# Altium PCB Motherboard.PcbDoc (part 1 of 2)
Units mm, origin at the board's own origin, x right, y up, seen from the top; angles counter-clockwise.
Board outline 89.6 x 89.6 mm, 4 copper layers (Top Layer, Int1 (GND), Int2 (PWR), Bottom Layer), stack 1.369 mm thick; 156 components, 137 nets, 650 pads, 0 vias.
Unrouted connection lines stored in the file: 429.
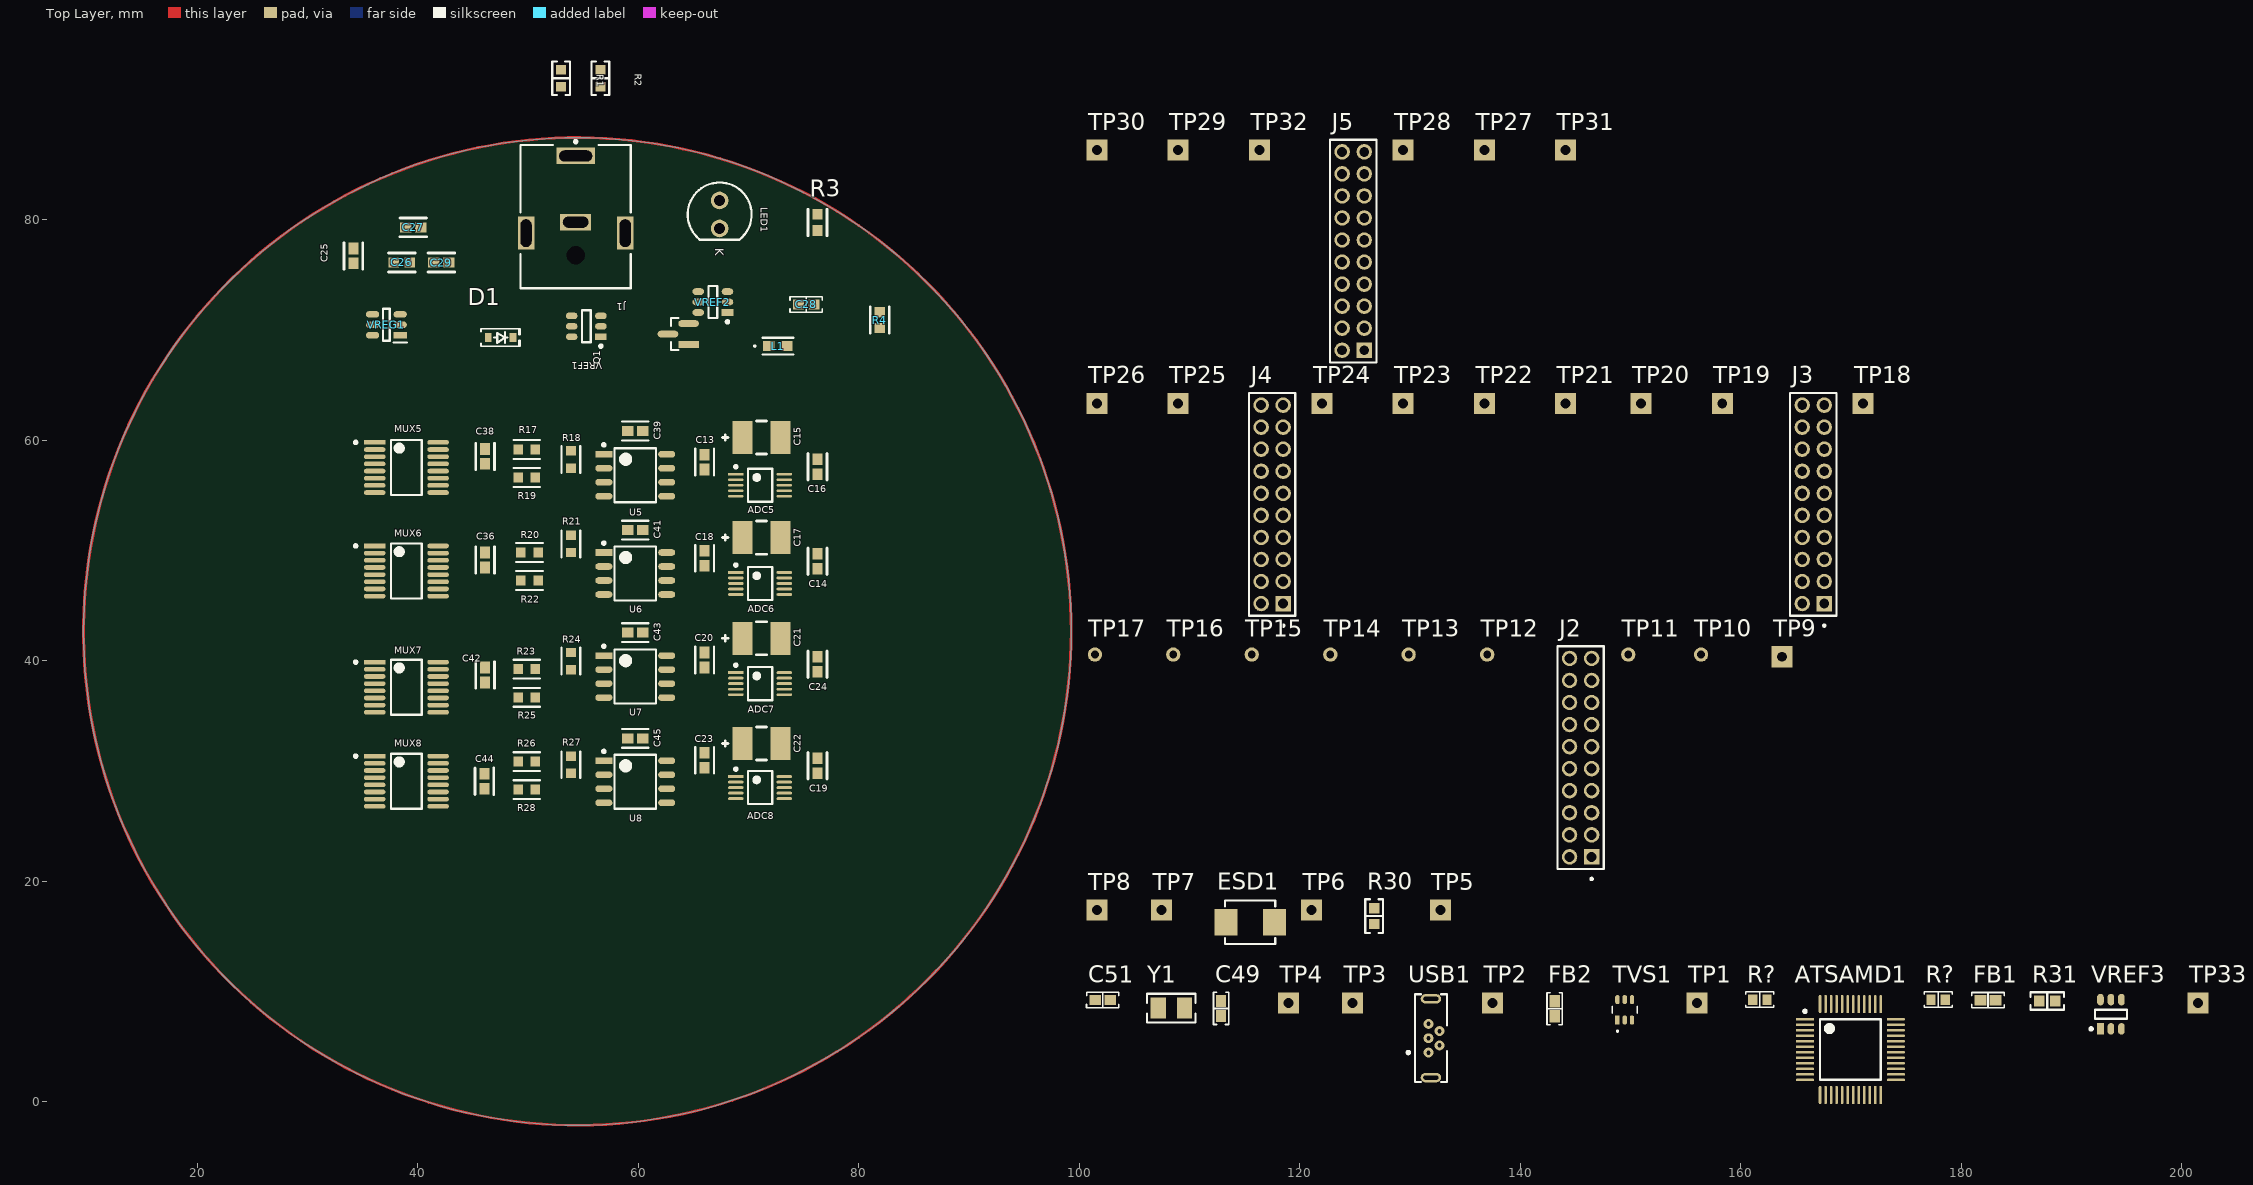
[diagram p0: Top Layer view]
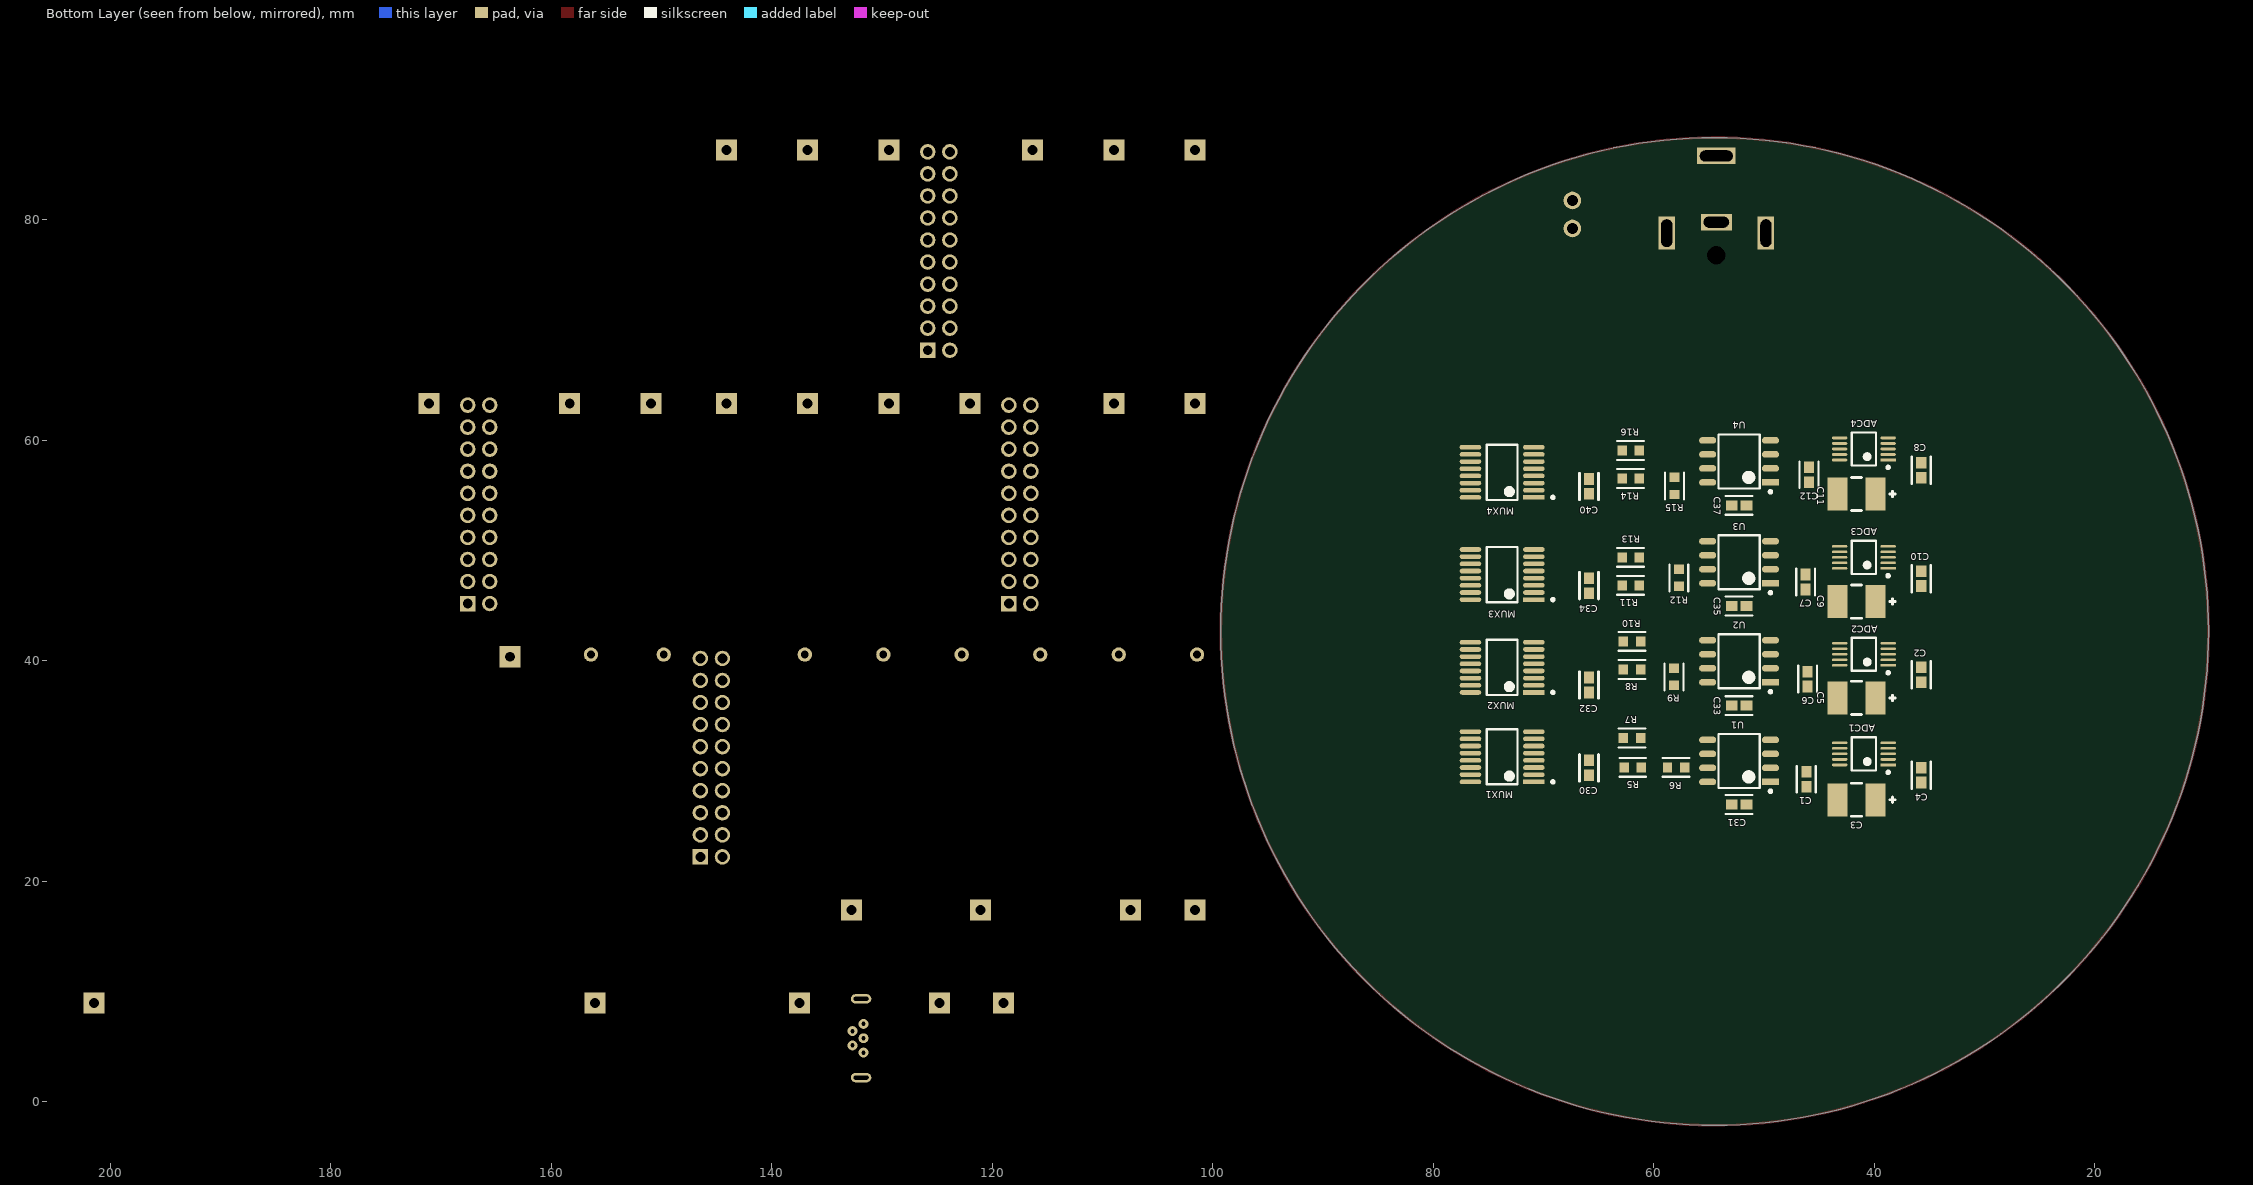
[diagram p1: Bottom Layer view, seen from below]
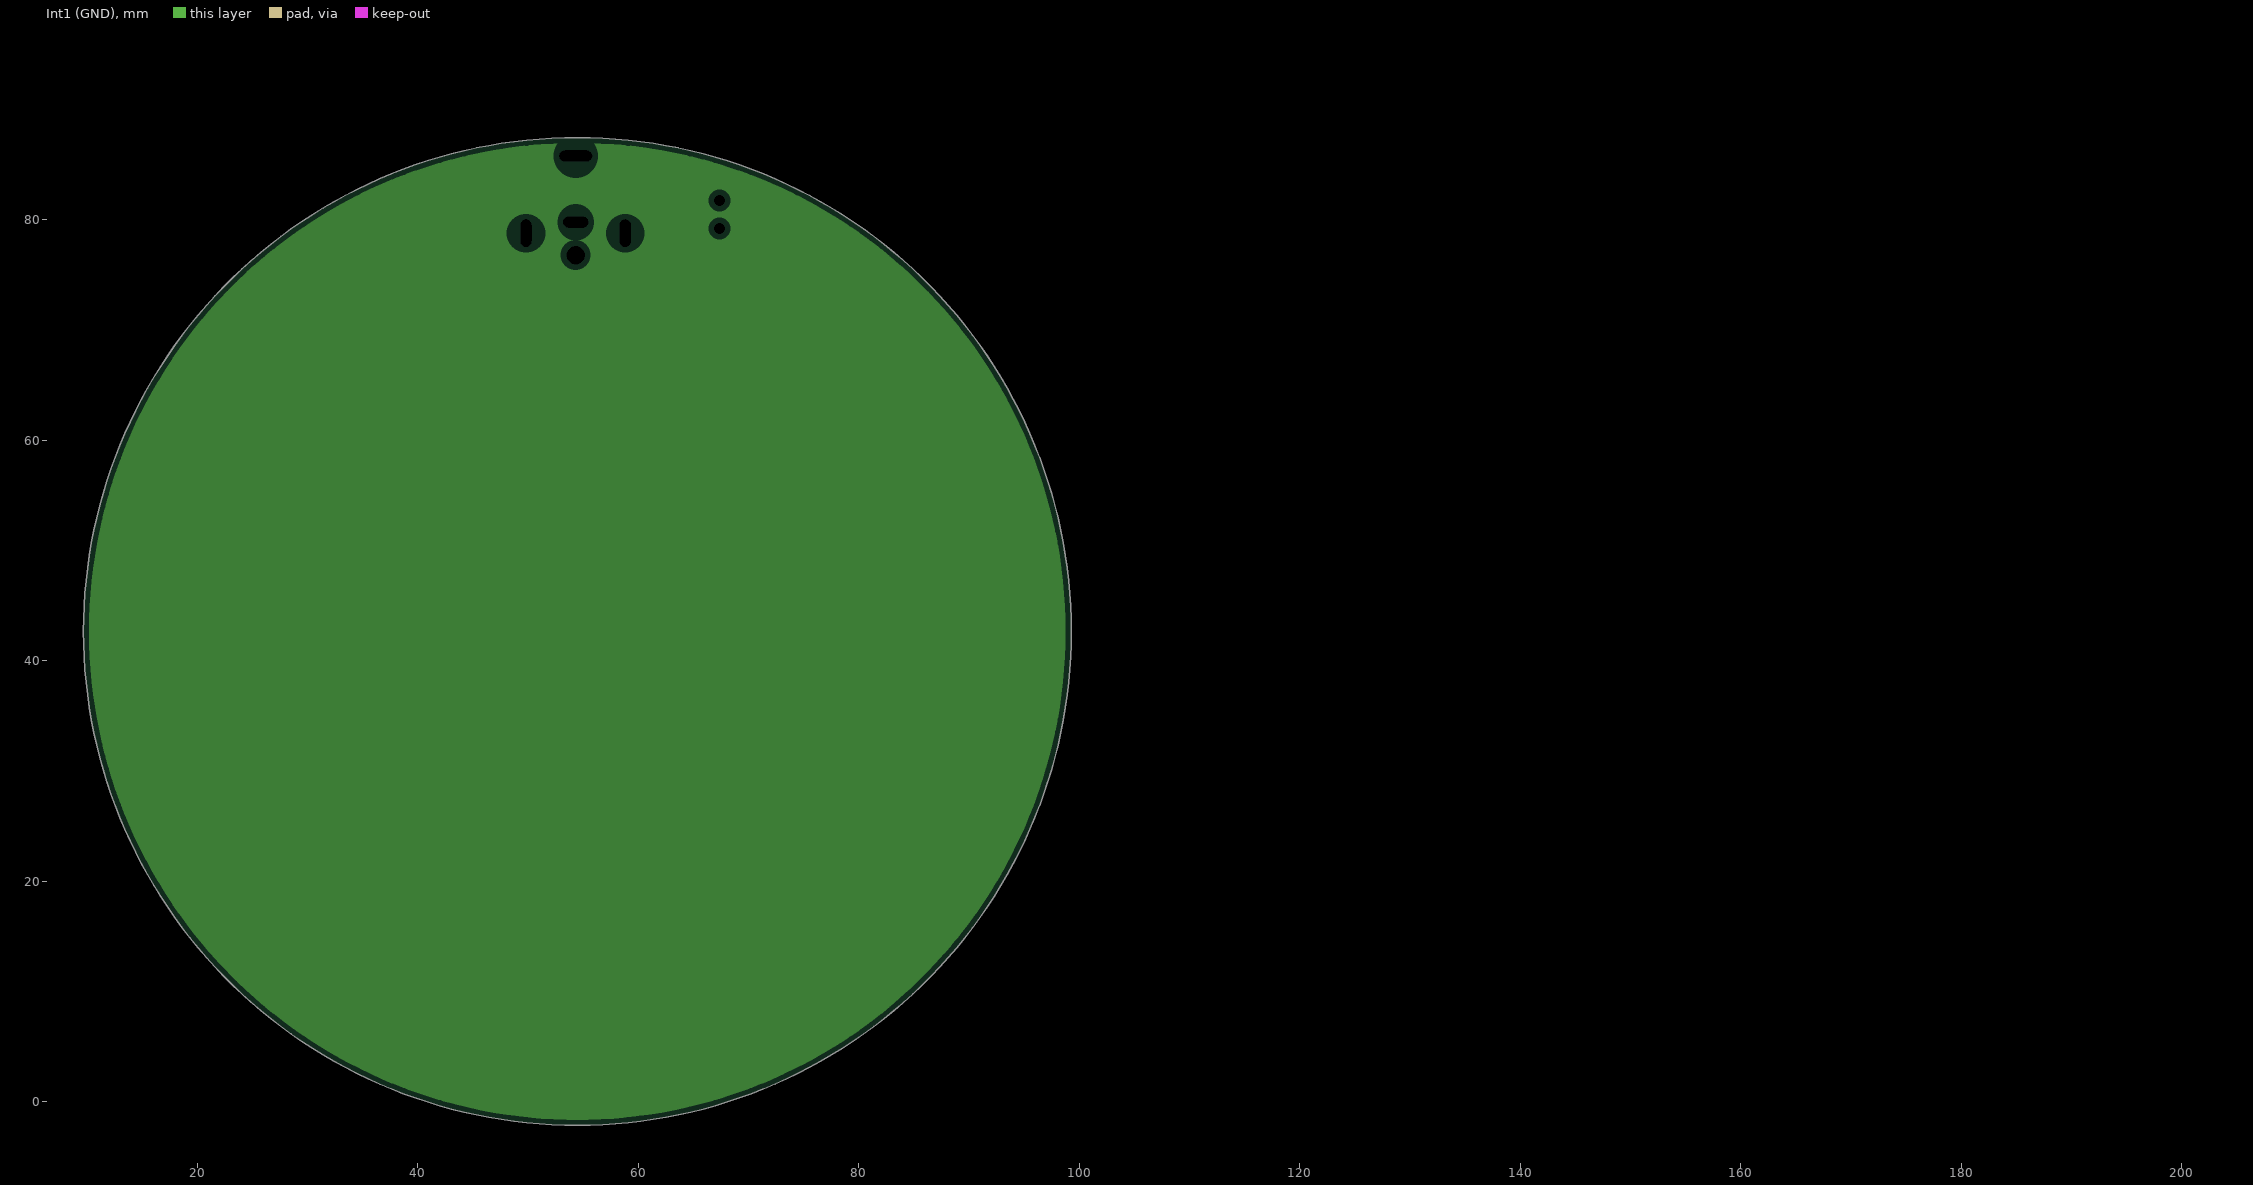
[diagram p2: Int1 (GND), clearances drawn from the general rule]
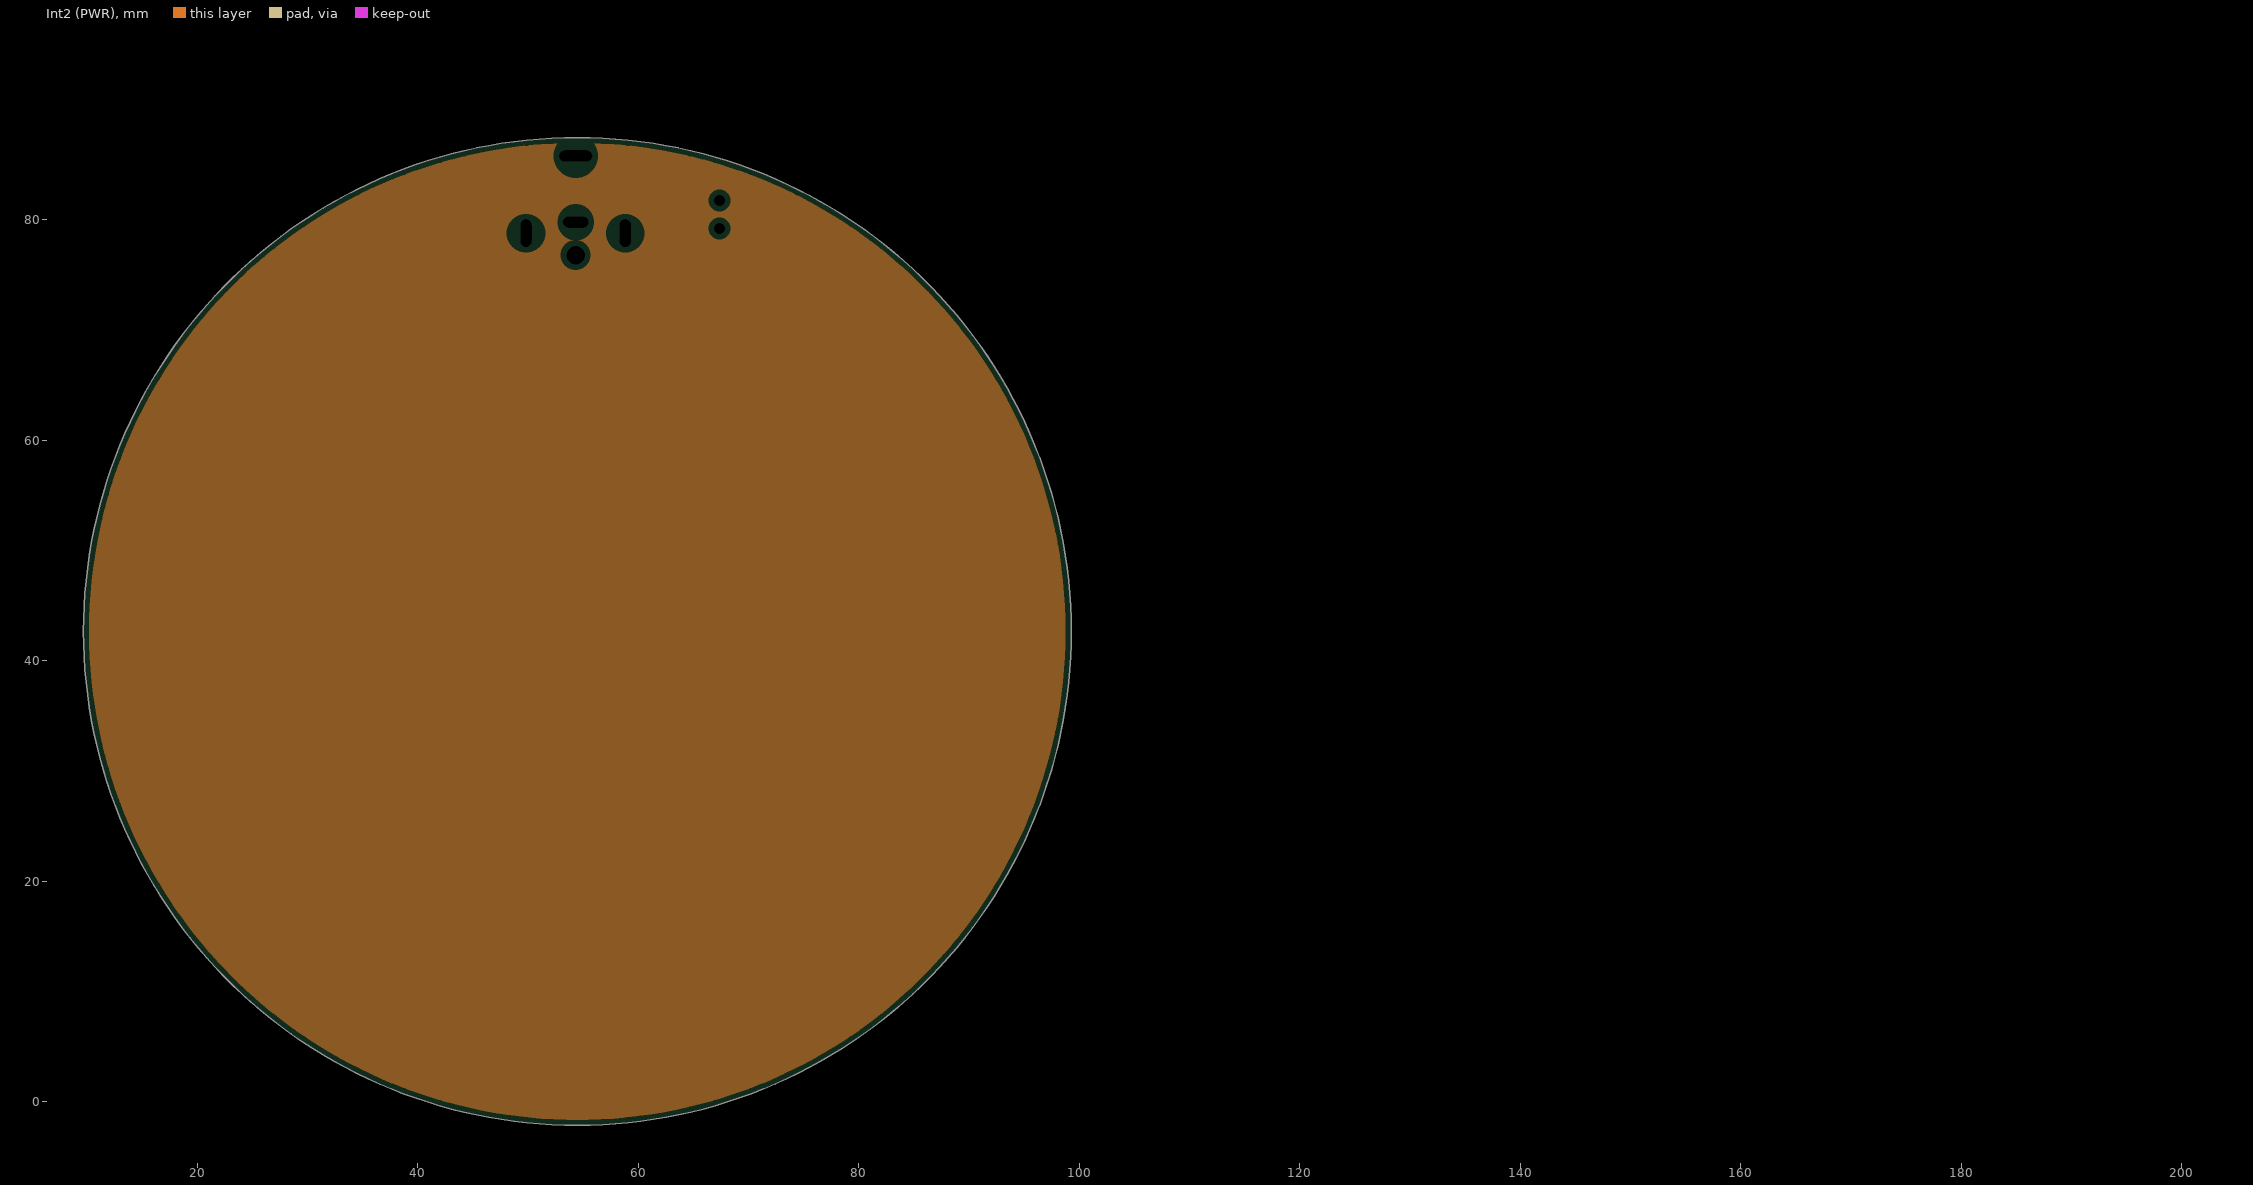
[diagram p3: Int2 (PWR), clearances drawn from the general rule]

## Layer stack, top to bottom
Top Solder: solder mask 0.0254, SM-001, Dk 4
Top Layer: signal copper 0.035
Dielectric 1: prepreg 0.1295, PP-017, Dk 4.3
Dielectric 2: prepreg 0.1295, PP-017, Dk 4.3
Int1 (GND): plane copper 0.035
Dielectric 3: core 0.7112, Core-039, Dk 4.8
Int2 (PWR): plane copper 0.035
Dielectric 4: prepreg 0.1295, PP-017, Dk 4.3
Dielectric 5: prepreg 0.1295, PP-017, Dk 4.3
Bottom Layer: signal copper 0.035
Bottom Solder: solder mask 0.0254, SM-001, Dk 4

## Board outline
9.683,42.672 ccw(c54.483,42.672) 54.483,-2.128 ccw(c54.483,42.672) 99.283,42.672 ccw(c54.483,42.672) 54.483,87.472 ccw(c54.483,42.672)

## Design rules (kind name [scope] priority, off if disabled: settings)
BoardOutlineClearance [All] p1: gap=0.2 ignorepadtopadclearanceinfootprint=FALSE
Clearance [All] p1: gap=0.2 ignorepadtopadclearanceinfootprint=TRUE
HoleSize [All] p1: absolutevalues=TRUE maxlimit=2.54 minlimit=0.2 maxpercent=80.000 minpercent=20.000
HoleToHoleClearance [All] p1: gap=0.5 allowstackedmicrovias=TRUE
MinimumAnnularRing [All] p1: minimumring=0.2
PlaneClearance [All] p1: clearance=0.508
PlaneConnect [All] p1: planeconnectstyle=Relief reliefexpansion=0.508 reliefentries=4 reliefconductorwidth=0.254 reliefairgap=0.254
PolygonConnect [All] p1: connectstyle=Relief reliefconductorwidth=0.254 reliefentries=4 polygonreliefangle="90 Angle" airgapwidth=0.254
RoutingVias [All] p1: holewidth=0.3 width=0.7 viastyle="Through Hole" minholewidth=0.2 minwidth=0.5 maxholewidth=0.5 maxwidth=0.9
SolderMaskExpansion [All] p1: expansion=0.102 istentingtop=FALSE
UnRoutedNet [All] p1: checkbadconnections=TRUE
Width [All] p1: maxlimit=0.5 minlimit=0.2 preferedwidth=0.3
25 further rules are at their usual default settings.

## Classes and differential pairs
component class Arduino: ATSAMD1 C46 C47 C49 C50 C51 C53 C54 C55 C57 D1 FB1 FB2 R29 R31 R? TP1 TP2 TP3 TP4 TP33 TVS1 USB1 VREF3 Y1
component class "Wheatstone bridge part I (Main)": *3 ADC1 ADC2 ADC3 C1 C2 C3 C4 C5 C6 C7 C8 C9 C10 C11 C12 C30 C32 C34 J2 MUX1 MUX2 MUX3 R5 R6 R7 R8 R9 R10 R11 R12 R13 TP9 TP10 TP11 TP12 TP13 TP14 TP15 TP16 TP17 U1 U2 U3
component class "Wheatstone bridge part II (Main)": *4 ADC4 ADC5 ADC6 C13 C14 C15 C16 C17 C18 C19 C20 C21 C36 C37 C38 C39 C40 C41 J3 J4 MUX4 MUX5 MUX6 R14 R15 R16 R17 R18 R19 R20 R21 R22 TP18 TP19 TP20 TP21 TP22 TP23 TP24 TP25 TP26 U4 U5 U6
component class "Wheatstone bridge part III (Main)": *5 ADC7 ADC8 C22 C23 C24 C31 C33 C35 C42 C43 C44 C45 J5 MUX7 MUX8 R23 R24 R25 R26 R27 R28 TP27 TP28 TP29 TP30 TP31 TP32 U7 U8
component class "Power Supply Unit (Main)": *2 C25 C26 C27 C28 C29 ESD1 J1 L1 LED1 Q1 R1 R2 R3 R4 R30 TP5 TP6 TP7 TP8 VREF1 VREF2 VREG1

## Components (designator, comment, footprint, x,y, rotation, side; value= is the part's Value field where it differs from the comment)
ADC1 "" MCP33141-10-E/MS 40.94,31.568 r0 bottom
ADC2 "" MCP33141-10-E/MS 40.94,40.598 r0 bottom
ADC3 "" MCP33141-10-E/MS 40.948,49.395 r0 bottom
ADC4 "" MCP33141-10-E/MS 40.948,59.229 r0 bottom
ADC5 "" MCP33141-10-E/MS 71.052,55.937 r0 top
ADC6 "" MCP33141-10-E/MS 71.052,47.023 r0 top
ADC7 "" MCP33141-10-E/MS 71.052,37.939 r0 top
ADC8 "" MCP33141-10-E/MS 71.052,28.511 r0 top
ATSAMD1 "" ATSAMD21G18-AU 169.958,4.75 r0 top
C1 "CC0603JRX7R9BB104" FP-CC0603-DA-IPC_B 46.169,29.261 r90 bottom
C2 "CC0603JRX7R9BB104" FP-CC0603-DA-IPC_B 35.741,38.735 r90 bottom
C3 "Cap 10 uF 16V Tantalum 1411" FP-293D-B-MFG 41.621,27.4 r180 bottom value=10μF
C4 "CC0603KPX7R7BB105" FP-CC0603-DA-IPC_B 35.741,29.642 r270 bottom value=1μF
C5 "CC0603JRX7R9BB104" FP-293D-B-MFG 41.621,36.644 r180 bottom
C6 "CC0603JRX7R9BB104" FP-CC0603-DA-IPC_B 46.042,38.349 r270 bottom
C7 "Cap 10 uF 16V Tantalum 1411" FP-CC0603-DA-IPC_B 46.222,47.157 r90 bottom value=10μF
C8 "CC0603KPX7R7BB105" FP-CC0603-DA-IPC_B 35.741,57.282 r90 bottom value=1μF
C9 "CC0603JRX7R9BB104" FP-293D-B-MFG 41.621,45.379 r180 bottom
C10 "CC0603JRX7R9BB104" FP-CC0603-DA-IPC_B 35.741,47.465 r270 bottom
C11 "Cap 10 uF 16V Tantalum 1411" FP-293D-B-MFG 41.621,55.147 r180 bottom value=10μF
C12 "CC0603KPX7R7BB105" FP-CC0603-DA-IPC_B 45.915,56.893 r270 bottom value=1μF
C13 "Cap Ceramic 0.1 uF SMT 0603" FP-CC0603-DA-IPC_B 66.032,58.033 r270 top
C14 "Cap 10 uF 16V Tantalum 1411" FP-CC0603-DA-IPC_B 76.259,49.036 r270 top value=10μF
C15 "Cap Ceramic 1 uF SMT 0603" FP-293D-B-MFG 71.179,60.265 r180 top value=1μF
C16 "Cap Ceramic 0.1 uF SMT 0603" FP-CC0603-DA-IPC_B 76.259,57.614 r90 top
C17 "Cap 10 uF 16V Tantalum 1411" FP-293D-B-MFG 71.179,51.185 r180 top value=10μF
C18 "Cap Ceramic 1 uF SMT 0603" FP-CC0603-DA-IPC_B 66.032,49.306 r90 top value=1μF
C19 "Cap Ceramic 0.1 uF SMT 0603" FP-CC0603-DA-IPC_B 76.259,30.486 r270 top
C20 "Cap 10 uF 16V Tantalum 1411" FP-CC0603-DA-IPC_B 66.032,40.079 r270 top value=10μF
C21 "Cap Ceramic 1 uF SMT 0603" FP-293D-B-MFG 71.179,42.051 r180 top value=1μF
C22 "Cap Ceramic 0.1 uF SMT 0603" FP-293D-B-MFG 71.179,32.502 r180 top
C23 "Cap Ceramic 0.1 uF SMT 0603" FP-CC0603-DA-IPC_B 66.032,30.986 r90 top
C24 "Cap 10 uF 16V Tantalum 1411" FP-CC0603-DA-IPC_B 76.259,39.698 r90 top value=10μF
C25 "Cap Ceramic 2.2 uF SMT 0603" FP-CC0603-DA-IPC_B 34.163,76.733 r90 top
C26 "Cap Ceramic 0.22 uF SMT 0603" FP-GRM188-0_1-e0_2_0_5-IPC_B 38.561,76.144 r180 top value=0.22µF
C27 "Cap Ceramic 0.1 uF SMT 0603" FP-CC0603-DA-IPC_B 39.6,79.325 r0 top
C28 "GRM188R60J106KE47J" "Cap Ceramic 10 uF SMT 0603" 75.235,72.339 r0 top
C29 "Cap Ceramic 2.2 uF SMT 0603" FP-CC0603-DA-IPC_B 42.145,76.137 r180 top
C30 "CC0603JRX7R9BB104" FP-CC0603-DA-IPC_B 65.881,30.301 r90 bottom
C31 "Cap Ceramic 1 uF SMT 0603" FP-CC0603-DA-IPC_B 52.265,26.977 r0 bottom value=1μF
C32 "CC0603JRX7R9BB104" FP-CC0603-DA-IPC_B 65.881,37.816 r90 bottom
C33 "Cap Ceramic 0.1 uF SMT 0603" FP-CC0603-DA-IPC_B 52.265,35.936 r0 bottom
C34 "CC0603JRX7R9BB104" FP-CC0603-DA-IPC_B 65.881,46.828 r90 bottom
C35 "Cap Ceramic 0.1 uF SMT 0603" FP-CC0603-DA-IPC_B 52.265,44.982 r0 bottom
C36 "Cap Ceramic 0.1 uF SMT 0603" FP-CC0603-DA-IPC_B 46.119,49.156 r270 top
C37 "Cap Ceramic 0.1 uF SMT 0603" FP-CC0603-DA-IPC_B 52.265,54.107 r0 bottom
C38 "Cap Ceramic 0.1 uF SMT 0603" FP-CC0603-DA-IPC_B 46.119,58.547 r270 top
C39 "Cap Ceramic 0.1 uF SMT 0603" FP-CC0603-DA-IPC_B 59.735,60.861 r0 top
C40 "Cap Ceramic 0.1 uF SMT 0603" FP-CC0603-DA-IPC_B 65.881,55.824 r90 bottom
C41 "Cap Ceramic 0.1 uF SMT 0603" FP-CC0603-DA-IPC_B 59.735,51.863 r0 top
C42 "Cap Ceramic 0.1 uF SMT 0603" FP-CC0603-DA-IPC_B 46.119,38.725 r270 top
C43 "Cap 10 uF 16V Tantalum 1411" FP-CC0603-DA-IPC_B 59.735,42.565 r0 top value=10μF
C44 "Cap Ceramic 0.1 uF SMT 0603" FP-CC0603-DA-IPC_B 46.05,29.077 r270 top
C45 "Cap Ceramic 1 uF SMT 0603" FP-CC0603-DA-IPC_B 59.735,32.972 r0 top value=1μF
C49 "CC0603JRNPO9BN200" "Capacitor 20 pF SMT 0603" 112.881,8.475 r90 top value="20 pF"
C51 "CC0603JRNPO9BN200" "Capacitor 20 pF SMT 0603" 102.13,9.25 r0 top value="20 pF"
D1 "" "Schottky Diode 30V SMT" 47.514,69.342 r0 top
ESD1 "TVS Diode 32.4V Clamp SMT" SMBJ20CA 115.506,16.301 r0 top
FB1 "BLM18PG471SN1D" "Ferrite Bead 470R SMT 0603" 182.434,9.225 r0 top value="470 Ω @ 100 MHz"
FB2 "BLM18PG471SN1D" "Ferrite Bead 470R SMT 0603" 143.132,8.45 r90 top value="470 Ω @ 100 MHz"
J1 "PJ-063AH" "DC Power Jack 2.1mm" 54.325,79.8 r270 top
J2 "BF050-20-A-B-0600-0300-L-G" "Headers 20 Pos TH 0.079\" A" 145.482,21.226 r90 top
J3 "BF050-20-A-B-0600-0300-L-G" "Headers 20 Pos TH 0.079\" A" 166.583,44.202 r90 top
J4 "BF050-20-A-B-0600-0300-L-G" "Headers 20 Pos TH 0.079\" A" 117.506,44.202 r90 top
J5 "BF050-20-A-B-0600-0300-L-G" "Headers 20 Pos TH 0.079\" A" 124.856,67.178 r90 top
L1 "" "Inductor 4.7 uH SMT 0603" 72.668,68.555 r0 top value=4.7μH
LED1 "151053GS03000" "Type 5mm" 67.386,80.493 r270 top
MUX1 "TMUX1208PWR" TMUX1208PWR 73.753,31.303 r0 bottom
MUX2 "TMUX1208PWR" TMUX1208PWR 73.753,39.414 r0 bottom
MUX3 "TMUX1208PWR" TMUX1208PWR 73.753,47.83 r0 bottom
MUX4 "TMUX1208PWR" TMUX1208PWR 73.753,57.104 r0 bottom
MUX5 "TMUX1208PWR" TMUX1208PWR 38.973,57.545 r0 top
MUX6 "TMUX1208PWR" TMUX1208PWR 38.973,48.154 r0 top
MUX7 "TMUX1208PWR" TMUX1208PWR 38.973,37.614 r0 top
MUX8 "TMUX1208PWR" TMUX1208PWR 38.973,29.087 r0 top
Q1 "MOSFET P-Channel 30V SMD" IRLML9303TRPBF 63.635,69.65 r180 top
R1 "AC0603FR-072K4L" "Res 2K4 SMT 0603" 53.008,92.848 r270 top value=2K4
R2 "AC0603FR-075K1L" "Res 5K1 SMT 0603" 56.574,92.848 r270 top value=5K1
R3 "Res 22K1 SMT 0603" CRCW060322K1FKEA-Footprint-2 76.257,79.769 r270 top
R4 "Res 88K7 SMT 0603" FP-CRCW0603-e3-IPC_B 81.915,70.917 r90 top
R5 "Res 10K SMT 0603" FP-RT0603-IPC_B 61.917,30.348 r0 bottom value=10K
R6 "Res 10K SMT 0603" FP-RT0603-IPC_B 57.98,30.348 r0 bottom value=10K
R7 "Res 10K SMT 0603" FP-RT0603-IPC_B 61.979,33.012 r0 bottom value=10K
R8 "Res 10K SMT 0603" FP-RT0603-IPC_B 61.979,39.228 r0 bottom value=10K
R9 "Res 10K SMT 0603" FP-RT0603-IPC_B 58.16,38.551 r270 bottom value=10K
R10 "Res 10K SMT 0603" FP-RT0603-IPC_B 61.979,41.768 r0 bottom value=10K
R11 "Res 10K SMT 0603" FP-RT0603-IPC_B 62.106,46.855 r0 bottom value=10K
R12 "Res 10K SMT 0603" FP-RT0603-IPC_B 57.726,47.531 r270 bottom value=10K
R13 "Res 10K SMT 0603" FP-RT0603-IPC_B 62.106,49.395 r0 bottom value=10K
R14 "Res 10K SMT 0603" FP-RT0603-IPC_B 62.105,56.548 r0 bottom value=10K
R15 "Res 10K SMT 0603" FP-RT0603-IPC_B 58.115,55.871 r270 bottom value=10K
R16 "Res 10K SMT 0603" FP-RT0603-IPC_B 62.105,59.088 r0 bottom value=10K
R17 "Res 10K SMT 0603" FP-RT0603-IPC_B 49.895,59.17 r0 top value=10K
R18 "Res 10K SMT 0603" FP-RT0603-IPC_B 53.893,58.265 r90 top value=10K
R19 "Res 10K SMT 0603" FP-RT0603-IPC_B 49.895,56.63 r0 top value=10K
R20 "Res 10K SMT 0603" FP-RT0603-IPC_B 50.142,49.833 r0 top value=10K
R21 "Res 10K SMT 0603" FP-RT0603-IPC_B 53.893,50.609 r90 top value=10K
R22 "Res 10K SMT 0603" FP-RT0603-IPC_B 50.142,47.293 r0 top value=10K
R23 "Res 10K SMT 0603" FP-RT0603-IPC_B 49.895,39.25 r0 top value=10K
R24 "Res 10K SMT 0603" FP-RT0603-IPC_B 53.893,39.986 r90 top value=10K
R25 "Res 10K SMT 0603" FP-RT0603-IPC_B 49.895,36.694 r0 top value=10K
R26 "Res 10K SMT 0603" FP-RT0603-IPC_B 49.895,30.866 r0 top value=10K
R27 "Res 10K SMT 0603" FP-RT0603-IPC_B 53.893,30.586 r90 top value=10K
R28 "Res 10K SMT 0603" FP-RT0603-IPC_B 49.895,28.326 r0 top value=10K
R30 "CRCW060350R0FKEA" "Res 50R SMT 0603" 126.756,16.851 r90 top value=50Ω
R31 "CRCW060350R0FKEA" "Res 50R SMT 0603" 187.809,9.15 r0 top value=50Ω
R? "22.1 kOhms" "RES 0603_1608" 177.909,9.275 r0 top
R? "88.7 kOhms" "RES 0603_1608" 161.733,9.275 r0 top
TP1 "Test Point" "SQ Pad"#1 156.058,8.975 r0 top
TP2 "Test Point" "SQ Pad"#1 137.507,8.975 r0 top
TP3 "Test Point" "SQ Pad"#1 124.806,8.975 r0 top
TP4 "Test Point" "SQ Pad"#1 118.981,8.975 r0 top
TP5 "Test Point" "SQ Pad"#1 132.756,17.401 r0 top
TP6 "Test Point" "SQ Pad"#1 121.081,17.401 r0 top
TP7 "Test Point" "SQ Pad"#1 107.455,17.401 r0 top
TP8 "Test Point" "SQ Pad"#1 101.63,17.401 r0 top
TP9 "Test Point" "SQ Pad"#1 163.733,40.377 r0 top
TP10 "Test Point" "SQ Pad"#2 156.408,40.577 r90 top
TP11 "Test Point" "SQ Pad"#2 149.807,40.577 r90 top
TP12 "Test Point" "SQ Pad"#2 137.007,40.577 r90 top
TP13 "Test Point" "SQ Pad"#2 129.881,40.577 r90 top
TP14 "Test Point" "SQ Pad"#2 122.781,40.577 r90 top
TP15 "Test Point" "SQ Pad"#2 115.656,40.577 r90 top
TP16 "Test Point" "SQ Pad"#2 108.53,40.577 r90 top
TP17 "Test Point" "SQ Pad"#2 101.43,40.577 r90 top
TP18 "Test Point" "SQ Pad"#1 171.108,63.353 r90 top
TP19 "Test Point" "SQ Pad"#1 158.333,63.353 r90 top
TP20 "Test Point" "SQ Pad"#1 150.957,63.353 r90 top
TP21 "Test Point" "SQ Pad"#1 144.107,63.353 r90 top
TP22 "Test Point" "SQ Pad"#1 136.757,63.353 r90 top
TP23 "Test Point" "SQ Pad"#1 129.381,63.353 r90 top
TP24 "Test Point" "SQ Pad"#1 122.031,63.353 r90 top
TP25 "Test Point" "SQ Pad"#1 108.98,63.353 r90 top
TP26 "Test Point" "SQ Pad"#1 101.63,63.353 r90 top
TP27 "Test Point" "SQ Pad"#1 136.757,86.329 r90 top
TP28 "Test Point" "SQ Pad"#1 129.381,86.329 r90 top
TP29 "Test Point" "SQ Pad"#1 108.98,86.329 r90 top
TP30 "Test Point" "SQ Pad"#1 101.63,86.329 r90 top
TP31 "Test Point" "SQ Pad"#1 144.107,86.329 r90 top
TP32 "Test Point" "SQ Pad"#1 116.356,86.329 r90 top
TP33 "Test Point" "SQ Pad"#1 201.485,8.975 r90 top
TVS1 "USB OTG TVS Diode Array 25V Clamp SMD" RCLAMP0504FA.TCT 149.482,8.35 r90 top
U1 "" MCP6N11-100E/SN 52.265,30.933 r0 bottom
U2 "" MCP6N11-100E/SN 52.265,39.963 r0 bottom
U3 "" MCP6N11-100E/SN 52.265,48.943 r0 bottom
U4 "Instrumentation Op Amp 35 MHz 8 pins" MCP6N11-100E/SN 52.265,58.094 r0 bottom
U5 "Instrumentation Op Amp 35 MHz 8 pins" MCP6N11-100E/SN 59.735,56.842 r0 top
U6 "Instrumentation Op Amp 35 MHz 8 pins" MCP6N11-100E/SN 59.735,47.928 r0 top
U7 "Instrumentation Op Amp 35 MHz 8 pins" MCP6N11-100E/SN 59.735,38.574 r0 top
U8 "Instrumentation Op Amp 35 MHz 8 pins" MCP6N11-100E/SN 59.735,29.035 r0 top
USB1 "USB3106-30-0230-A" "USB Micro-AB Connector B" 131.681,5.775 r90 top
VREF1 "Voltage Reference Series Fixed 3.3V" MCP1501T-XXE/CHY 55.292,70.348 r180 top
VREF2 "Voltage Reference Series Fixed 1.8V" MCP1501T-XXE/CHY 66.772,72.553 r180 top
VREF3 "Voltage Reference Series Fixed 3.3V" MCP1501T-XXE/CHY 193.584,7.95 r90 top
VREG1 "Buck Adjustable Switching Reg Pos" LMR50410YFQDBVRQ1 37.16,70.485 r180 top
Y1 "ABS07-120-32.768KHZ-T" "ABS07-120-32.768KHZ-T A" 108.355,8.5 r0 top value=32.768kHz

## Footprints (in the part's own frame and the unit in brackets; to place one, negate y for a bottom-side part, rotate by r counter-clockwise, add the part's x,y. Pads: shape width x height; smd on the part's side, far side on the other; paste and mask are expansions set on the pad)
"ABS07-120-32.768KHZ-T A" [mm] "32.768 kHz ±20ppm Crystal 6pF 55 kOhms 2-SMD, No Lead"
  rect 1.4x1.9 smd: 1(-1.2,0) 2(1.2,0)
  silkscreen extent -2.2,-1.3 2.2,1.3, body extent -1.85,-1 1.85,1, height 0.25
ATSAMD21G18-AU [mm] "ARM® Cortex®-M0+ SAM D21G, Functional Safety (FuSa) Microcontroller IC 32-Bit Single-Core 48MHz 256KB (256K x 8) FLASH 48-TQFP (7x7)"
  rect 1.655x0.252 smd paste+0 mask+0: 1(-4.125,2.75)
  rrect100% 1.655x0.252 smd paste+0 mask+0: 2(-4.125,2.25) 3(-4.125,1.75) 4(-4.125,1.25) 5(-4.125,0.75) 6(-4.125,0.25) 7(-4.125,-0.25) 8(-4.125,-0.75) 9(-4.125,-1.25) 10(-4.125,-1.75) 11(-4.125,-2.25) 12(-4.125,-2.75) 25(4.125,-2.75) 26(4.125,-2.25) 27(4.125,-1.75) 28(4.125,-1.25) 29(4.125,-0.75) 30(4.125,-0.25) 31(4.125,0.25) 32(4.125,0.75) 33(4.125,1.25) 34(4.125,1.75) 35(4.125,2.25) 36(4.125,2.75)
  rrect100% 0.252x1.655 smd paste+0 mask+0: 13(-2.75,-4.125) 14(-2.25,-4.125) 15(-1.75,-4.125) 16(-1.25,-4.125) 17(-0.75,-4.125) 18(-0.25,-4.125) 19(0.25,-4.125) 20(0.75,-4.125) 21(1.25,-4.125) 22(1.75,-4.125) 23(2.25,-4.125) 24(2.75,-4.125) 37(2.75,4.125) 38(2.25,4.125) 39(1.75,4.125) 40(1.25,4.125) 41(0.75,4.125) 42(0.25,4.125) 43(-0.25,4.125) 44(-0.75,4.125) 45(-1.25,4.125) 46(-1.75,4.125) 47(-2.25,4.125) 48(-2.75,4.125)
  silkscreen extent -4.25,-2.75 2.75,3.58, body extent -5.2,-5.2 5.2,5.2, height 0.25
"Cap Ceramic 10 uF SMT 0603" [mm] "10 µF ±10% 6.3V Ceramic Capacitor X5R 0603 (1608 Metric)"
  rect 1.008x0.912 smd paste+0 mask+0: 1(-0.702,0) 2(0.702,0)
  silkscreen extent -1.46,-0.7 1.46,0.7, body extent -1.46,-0.71 1.46,0.71, height 0.25
"Capacitor 20 pF SMT 0603" [mm]
  rect 1.058x0.912 smd paste+0 mask+0: 1(-0.677,0) 2(0.677,0)
  silkscreen extent -1.46,-0.7 1.46,0.7, body extent -1.46,-0.71 1.46,0.71, height 0.25
CRCW060322K1FKEA-Footprint-2 [mm]
  rect 0.958x0.912 smd paste+0 mask+0: 1(-0.727,0) 2(0.727,0)
  silkscreen extent -1.21,-0.86 1.21,0.86, body extent -1.46,-0.71 1.46,0.71, height 0.25
"DC Power Jack 2.1mm" [mm] "PJ-063AH"
  rect 1.5x3.5 hole 1 slot 3 at 90 deg: 1(-6,0)
  rect 1.5x2.8 hole 1 slot 2.3 at 90 deg: 2(0,0)
  rect 3x1.5 hole 1 slot 2.5 at 0 deg: 3(1,4.5) 4(1,-4.5)
  round 1.4 hole 1.7 unplated: 5(3,0)
  silkscreen extent -7.42,-5 6,5, body extent -7,-5.15 6,5.15, height 9
"Ferrite Bead 470R SMT 0603" [mm] "470 Ohms @ 100 MHz 1 Power Line Ferrite Bead 0603 (1608 Metric) 1A 200mOhm"
  rect 1.106x0.958 smd paste+0 mask+0: 1(-0.676,0) 2(0.676,0)
  silkscreen extent -1.46,-0.7 1.46,0.7, body extent -1.48,-0.73 1.48,0.73, height 0.25
FP-293D-B-MFG [mm]
  rect 1.8x3 smd paste+0 mask+0: 1(-1.725,0) 2(1.725,0)
  silkscreen extent -0.45,-1.5 3.52,1.5, body extent -1.75,-1.4 1.75,1.4, height 2.1
FP-CC0603-DA-IPC_B [mm]
  rect 1.058x0.912 smd paste+0 mask+0: 1(-0.677,0) 2(0.677,0)
  silkscreen extent -1.21,-0.86 1.21,0.86, body extent -0.8,-0.4 0.8,0.4, height 0.9
FP-CRCW0603-e3-IPC_B [mm]
  rect 0.935x0.962 smd paste+0 mask+0: 1(-0.715,0) 2(0.715,0)
  silkscreen extent -1.21,-0.86 1.21,0.86, body extent -1.43,-0.73 1.43,0.73, height 0.25
FP-GRM188-0_1-e0_2_0_5-IPC_B [mm]
  rect 0.959x0.912 smd paste+0 mask+0: 1(-0.727,0) 2(0.727,0)
  silkscreen extent -1.21,-0.86 1.21,0.86, body extent -1.46,-0.71 1.46,0.71, height 0.25
FP-RT0603-IPC_B [mm]
  rect 0.859x0.912 smd paste+0 mask+0: 1(-0.777,0) 2(0.777,0)
  silkscreen extent -1.21,-0.86 1.21,0.86, body extent -0.76,-0.4 0.84,0.4, height 0.58
"Headers 20 Pos TH 0.079\" A" [mm] "Connector Header Through Hole 20 position 0.079\" (2.00mm)"
  rect 1.4x1.4 hole 0.9: 1(1,-1)
  round 1.4 hole 0.9: 2(3,-1) 3(5,-1) 4(7,-1) 5(9,-1) 6(11,-1) 7(13,-1) 8(15,-1) 9(17,-1) 10(19,-1) 11(19,1) 12(17,1) 13(15,1) 14(13,1) 15(11,1) 16(9,1) 17(7,1) 18(5,1) 19(3,1) 20(1,1)
  silkscreen extent -1.1,-2.1 20.1,2.1, body extent 0,-2 20,2, height 5
"Inductor 4.7 uH SMT 0603" [mil] "4.7 µH Shielded Multilayer Inductor 15 mA 2.1Ohm Max 0603 (1608 Metric)"
  rect 40x35 smd paste+0 mask+0: 1(-32.5,0) 2(32.5,0)
  silkscreen extent -85,-30 55,30, body extent -34,-19 34,19, height 39
IRLML9303TRPBF [mm] "P-Channel 30 V 2.3A (Ta) 1.25W (Ta) Surface Mount Micro3™/SOT-23"
  rect 1.874x0.612 smd paste+0 mask+0: 1(-0.935,0.95)
  rrect100% 1.874x0.612 smd paste+0 mask+0: 2(-0.935,-0.95) 3(0.935,0)
  silkscreen extent 0,-1.46 0.65,1.46, body extent -2.37,-1.96 2.37,1.96, height 0.25
LMR50410YFQDBVRQ1 [mm] "Buck Switching Regulator IC Positive Adjustable 1V 1 Output 1A SOT-23-6"
  rect 1.2x0.6 smd: 1(-1.25,0.95)
  oval 1.2x0.6 smd: 2(-1.25,0) 3(-1.25,-0.95) 4(1.25,-0.95) 5(1.25,0) 6(1.25,0.95)
  silkscreen extent -1.85,-1.45 0.3,1.6, body extent -1.4,-1.45 1.4,1.45, height 1.45
MCP6N11-100E/SN [mm] "Instrumentation Amplifier 1 Circuit Rail-to-Rail 8-SOIC"
  rect 1.55x0.6 smd: 1(-2.85,1.905)
  oval 1.55x0.6 smd: 2(-2.85,0.635) 3(-2.85,-0.635) 4(-2.85,-1.905) 5(2.85,-1.905) 6(2.85,-0.635) 7(2.85,0.635) 8(2.85,1.905)
  silkscreen extent -2.97,-2.45 1.88,2.88, body extent -3,-2.45 3,2.45, height 1.75
MCP1501T-XXE/CHY [mm] "Series Voltage Reference IC Fixed V ±0.1% 20 mA SOT-23-6"
  rect 1.05x0.6 smd: 1(-1.325,0.95)
  oval 1.05x0.6 smd: 2(-1.325,0) 3(-1.325,-0.95) 4(1.325,-0.95) 5(1.325,0) 6(1.325,0.95)
  silkscreen extent -1.45,-1.45 0.4,1.92, body extent -1.4,-1.45 1.4,1.45, height 1.17
MCP33141-10-E/MS [mm] "12 Bit Analog to Digital Converter 1 Input 1 SAR 10-MSOP"
  rect 1.4x0.25 smd: 1(-2.2,1)
  oval 1.4x0.25 smd: 2(-2.2,0.5) 3(-2.2,0) 4(-2.2,-0.5) 5(-2.2,-1) 6(2.2,-1) 7(2.2,-0.5) 8(2.2,0) 9(2.2,0.5) 10(2.2,1)
  silkscreen extent -2.32,-1.5 1.1,1.8, body extent -2.45,-1.5 2.45,1.5, height 1.1
RCLAMP0504FA.TCT [mil]
  rect 33x16 smd paste+0 mask+0: 1(-36.5,26)
  oval 33x16 smd paste+0 mask+0: 2(-36.5,0) 3(-36.5,-26) 4(36.5,-26) 5(36.5,0) 6(36.5,26)
  silkscreen extent -79,-44 12,44, body extent -39,-39 39,39, height 43
"Res 2K4 SMT 0603" [mm] "2.4 kOhms ±1% 0.1W, 1/10W Chip Resistor 0603 (1608 Metric) Automotive AEC-Q200, Moisture Resistant Thick Film"
  rect 0.859x0.912 smd paste+0 mask+0: 1(-0.777,0) 2(0.777,0)
  silkscreen extent -1.52,-0.8 1.52,0.8, body extent -1.46,-0.71 1.46,0.71, height 0.25
"Res 5K1 SMT 0603" [mm] "5.1 kOhms ±1% 0.1W, 1/10W Chip Resistor 0603 (1608 Metric) Automotive AEC-Q200, Moisture Resistant Thick Film"
  rect 0.859x0.912 smd paste+0 mask+0: 1(-0.777,0) 2(0.777,0)
  silkscreen extent -1.52,-0.8 1.52,0.8, body extent -1.46,-0.71 1.46,0.71, height 0.25
"Res 50R SMT 0603" [mm] "50O ±1% 0.1W, 1/10W Chip Resistor 0603 (1608 Metric) Automotive AEC-Q200 Thick Film"
  rect 0.935x0.962 smd paste+0 mask+0: 1(-0.715,0) 2(0.715,0)
  silkscreen extent -1.52,-0.8 1.52,0.8, body extent -1.43,-0.73 1.43,0.73, height 0.25
"RES 0603_1608" [mm] "Chip Resistor, 2-Leads, Body 1.60x0.80mm, IPC Medium Density"
  rect 0.85x0.95 smd: 1(-0.65,0) 2(0.65,0)
  silkscreen extent -1.27,-0.7 1.27,0.7, body extent -0.8,-0.4 0.8,0.4, height 0.45
"Schottky Diode 30V SMT" [mm] "NSR0530HT1G"
  rect 0.625x0.83 smd: 1(-1.112,0) 2(1.112,0)
  silkscreen extent -1.78,-0.8 1.78,0.8, body extent -1.36,-0.62 1.36,0.62, height 1.05
SMBJ20CA [mm] "32.4V Clamp 18.6A Ipp Tvs Diode Surface Mount SMB (DO-214AA)"
  rect 2.1x2.4 smd paste+0 mask+0: 1(-2.2,0) 2(2.2,0)
  silkscreen extent -2.28,-1.97 2.28,1.97, body extent -2.72,-2.07 2.72,2.07, height 0.25
"SQ Pad"#1 [mm] "Pad"
  rect 1.905x1.905 hole 0.899: 1(0,0)
"SQ Pad"#2 [mm] "Pad"
  round 1.3 hole 0.7: 1(0,0)
TMUX1208PWR [mm] "5-V, 8: 1, 1-channel general-purpose analog multiplexer with 1.8-V input logic 16-TSSOP -40 to 125"
  rect 1.955x0.421 smd paste+0 mask+0: 1(-2.875,2.275)
  rrect100% 1.955x0.421 smd paste+0 mask+0: 2(-2.875,1.625) 3(-2.875,0.975) 4(-2.875,0.325) 5(-2.875,-0.325) 6(-2.875,-0.975) 7(-2.875,-1.625) 8(-2.875,-2.275) 9(2.875,-2.275) 10(2.875,-1.625) 11(2.875,-0.975) 12(2.875,-0.325) 13(2.875,0.325) 14(2.875,0.975) 15(2.875,1.625) 16(2.875,2.275)
  silkscreen extent -4.73,-2.5 1.4,2.5, body extent -3.2,-2.5 3.2,2.5, height 1.2
"Type 5mm" [mm] "THT, LED-5mm, 2pin- Body 5.8mm"
  round 1.6 hole 1: 1(1.27,0) 2(-1.27,0)
  silkscreen extent -2.9,-2.9 2.29,2.9, body extent -2.9,-2.9 2.5,2.9, height 11.7
"USB Micro-AB Connector B" [mm] "USB - Micro AB 2.0 Receptacle Connector 5 Position, Vertical, Through Hole with 2.30 mm (Standard) Shell Stakes, 5-Pin THD, RoHS, Tape and Reel"
  round 0.9 hole 0.4: 1(-1.3,0) 2(-0.65,-1) 3(0,0) 4(0.65,-1) 5(1.3,0)
  oval 0.85x1.85 hole 0.35 slot 1.35 at 90 deg: 6(-3.575,-0.22) 7(3.575,-0.22)
  silkscreen extent -3.98,-1.67 3.98,1.95, body extent -3.98,-1.68 3.98,1.25, height 5.61

## Part data
ADC1 ADC2 ADC3 ADC4 ADC5 ADC6 ADC7 ADC8: library part "ADC 12 bits 1MSPS", "12 Bit Analog to Digital Converter 1 Input 1 SAR 10-MSOP", Supplier Part Number 1=MCP33141-10-E/MS-ND, Supplier 1=Digi-Key
ATSAMD1: library part ATSAMD21G18A-AU, "ARM® Cortex®-M0+ SAM D21G, Functional Safety (FuSa) Microcontroller IC 32-Bit Single-Core 48MHz 256KB (256K x 8) FLASH 48-TQFP (7x7)", Supplier Part Number 1=ATSAMD21G18A-AU-ND, ComponentLink1Description=Datasheet, ComponentLink1URL=https://ww1.microchip.com/downloads/en/DeviceDoc/SAM-D21-DA1-Family-Data-Sheet-DS40001882H.pdf, ComponentLink2Description="Arduino Zero", ComponentLink2URL=https://docs.arduino.cc/hardware/zero, Supplier 1=Digi-Key
C1 C2 C5 C6 C9 C10 C30 C32 C34: library part "Cap Ceramic 0.1 uF SMT 0603", "0.1 µF ±5% 50V Ceramic Capacitor X7R 0603 (1608 Metric)", Capacitance=0.1µF, Device Package="0603 (1608 Metric)", Manufacturer=Yageo, Operating Temperature="-55°C ~ 125°C", Supplier Part Number 1=311-1779-1-ND, Temperature Coefficient=X7R, Tolerance=±5%, Voltage - Rated=50V, Applications="General Purpose", ComponentLink1Description=Datasheet, ComponentLink1URL=https://www.yageo.com/upload/media/product/productsearch/datasheet/mlcc/UPY-GPHC_X7R_6.3V-to-50V_18.pdf, ComponentLink2Description="DigiKey Link", ComponentLink2URL=https://www.digikey.com/en/products/detail/yageo/CC0603JRX7R9BB104/5195188, lastupdated="2023-03-06 20:08:09", Lifecycle Status=Active, Minimum Order=1, Mounting Type="Surface Mount, MLCC", Package / Case="0603 (1608 Metric)", Packaging=TapeAndReel, Part Number=CC0603JRX7R9BB104, Part Status=Active, partid=12474, price=0.01, Series=CC, Size / Dimension="0.063\" L x 0.031\" W (1.60mm x 0.80mm)", Supplier 1=Digi-Key, Supplier 2=Digi-Key, Supplier 3=Digi-Key, Supplier Part Number 2=311-1779-6-ND, Supplier Part Number 3=311-1779-2-ND, Thickness (Max)="0.035\" (0.90mm)"
C3 C7 C11 C14 C17 C20 C24 C43: "10 µF Molded Tantalum Capacitors 16 V 1411 (3528 Metric) 2Ohm", Case Code (Imperial)=1411, Supplier Part Number 1=718-1124-1-ND, Voltage Rating=16V, Supplier 1=Digi-Key, Supplier 2=Digi-Key, Supplier 3=Digi-Key, Supplier Part Number 2=718-1124-6-ND, Supplier Part Number 3=718-1124-2-ND
C4 C8 C12: library part "Cap Ceramic 1 uF SMT 0603", "1 µF ±10% 16V Ceramic Capacitor X7R 0603 (1608 Metric)", Case Code (Imperial)=0603, Dielectric=XR7, Max Operating Temperature=125°C, Min Operating Temperature=-55°C, Resistor Type=Ceramic, Supplier Part Number 1=13-CC0603KPX7R7BB105CT-ND, Tolerance=10%, Voltage Rating (DC)=16V, Construction=Flat, Height=0.8mm, Length=1.6mm, Supplier 1=Digi-Key, Supplier 2=Digi-Key, Supplier 3=Digi-Key, Supplier Part Number 2=13-CC0603KPX7R7BB105DKR-ND, Supplier Part Number 3=13-CC0603KPX7R7BB105TR-ND, Termination=SMT/SMD
C13 C16 C19 C22 C23 C27 C33 C35 C36 C37 C38 C39 C40 C41 C42 C44: "0.1 µF ±5% 50V Ceramic Capacitor X7R 0603 (1608 Metric)", Capacitance=0.1µF, Device Package="0603 (1608 Metric)", Manufacturer=Yageo, Operating Temperature="-55°C ~ 125°C", Part Number=CC0603JRX7R9BB104, Supplier Part Number 1=311-1779-1-ND, Temperature Coefficient=X7R, Tolerance=±5%, Voltage - Rated=50V, Applications="General Purpose", ComponentLink1Description=Datasheet, ComponentLink1URL=https://www.yageo.com/upload/media/product/productsearch/datasheet/mlcc/UPY-GPHC_X7R_6.3V-to-50V_18.pdf, ComponentLink2Description="DigiKey Link", ComponentLink2URL=https://www.digikey.com/en/products/detail/yageo/CC0603JRX7R9BB104/5195188, lastupdated="2023-03-06 20:08:09", Lifecycle Status=Active, Minimum Order=1, Mounting Type="Surface Mount, MLCC", Package / Case="0603 (1608 Metric)", Packaging=TapeAndReel, Part Status=Active, partid=12474, price=0.01, Series=CC, Size / Dimension="0.063\" L x 0.031\" W (1.60mm x 0.80mm)", Supplier 1=Digi-Key, Supplier 2=Digi-Key, Supplier 3=Digi-Key, Supplier Part Number 2=311-1779-6-ND, Supplier Part Number 3=311-1779-2-ND, Thickness (Max)="0.035\" (0.90mm)"
C15 C18 C21 C31 C45: "1 µF ±10% 16V Ceramic Capacitor X7R 0603 (1608 Metric)", Case Code (Imperial)=0603, Dielectric=XR7, Max Operating Temperature=125°C, Min Operating Temperature=-55°C, Resistor Type=Ceramic, Supplier Part Number 1=13-CC0603KPX7R7BB105CT-ND, Tolerance=10%, Voltage Rating (DC)=16V, Construction=Flat, Height=0.8mm, Length=1.6mm, Supplier 1=Digi-Key, Supplier 2=Digi-Key, Supplier 3=Digi-Key, Supplier Part Number 2=13-CC0603KPX7R7BB105DKR-ND, Supplier Part Number 3=13-CC0603KPX7R7BB105TR-ND, Termination=SMT/SMD
C25 C29: "2.2 µF ±10% 6.3V Ceramic Capacitor X7R 0603 (1608 Metric)", Capacitance=2.2µF, Device Package="0603 (1608 Metric)", Manufacturer=Yageo, Operating Temperature="-55°C ~ 125°C", Part Number=CC0603KRX7R5BB225, Supplier Part Number 1=311-1795-1-ND, Temperature Coefficient=X7R, Tolerance=±10%, Voltage - Rated=6.3V, Applications="General Purpose", ComponentLink1Description=Datasheet, ComponentLink2Description="DigiKey Link", ComponentLink2URL=https://www.digikey.com/en/products/detail/yageo/CC0603KRX7R5BB225/5195203, lastupdated="2023-03-06 20:08:32", Lifecycle Status=Active, Minimum Order=1, Mounting Type="Surface Mount, MLCC", Package / Case="0603 (1608 Metric)", Packaging=TapeAndReel, Part Status=Active, partid=41539, price=0.01, Series=CC, Size / Dimension="0.063\" L x 0.031\" W (1.60mm x 0.80mm)", Supplier 1=Digi-Key, Supplier 2=Digi-Key, Supplier 3=Digi-Key, Supplier Part Number 2=311-1795-6-ND, Supplier Part Number 3=311-1795-2-ND, Thickness (Max)="0.035\" (0.90mm)"
C26: "0.22 µF ±10% 25V Ceramic Capacitor X7R 0603 (1608 Metric)", Capacitance=0.22µF, Device Package="0603 (1608 Metric)", Manufacturer="Murata Electronics", Operating Temperature="-55°C ~ 125°C", Part Number=GRM188R71E224KA88D, Supplier Part Number 1=490-3290-1-ND, Temperature Coefficient=X7R, Tolerance=±10%, Voltage - Rated=25V, Applications="General Purpose", ComponentLink1Description=Datasheet, ComponentLink1URL=https://www.murata.com/~/media/webrenewal/support/library/catalog/products/capacitor/mlcc/c02e.ashx?la=en-us, ComponentLink2Description="DigiKey Link", ComponentLink2URL=https://www.digikey.com/en/products/detail/murata-electronics/GRM188R71E224KA88D/702554, lastupdated="2023-03-05 20:08:17", Lifecycle Status=Active, Minimum Order=1, Mounting Type="Surface Mount, MLCC", Package / Case="0603 (1608 Metric)", Packaging=TapeAndReel, Part Status=Active, partid=11196, price=0.01, Series=GRM, Size / Dimension="0.063\" L x 0.031\" W (1.60mm x 0.80mm)", Supplier 1=Digi-Key, Supplier 2=Digi-Key, Supplier 3=Digi-Key, Supplier Part Number 2=490-3290-6-ND, Supplier Part Number 3=490-3290-2-ND, Thickness (Max)="0.035\" (0.90mm)"
C28: library part "Cap Ceramic 10 uF SMT 0603", "10 µF ±10% 6.3V Ceramic Capacitor X5R 0603 (1608 Metric)", Capacitance="10 µF", Device Package="0603 (1608 Metric)", Manufacturer="Murata Electronics", Operating Temperature="-55°C ~ 85°C", Supplier Part Number 1=490-GRM188R60J106KE47JCT-ND, Temperature Coefficient=X5R, Tolerance=±10%, Voltage - Rated=6.3V, Applications="General Purpose", ComponentLink2Description="DigiKey Link", ComponentLink2URL=https://www.digikey.com/en/products/detail/murata-electronics/GRM188R60J106KE47J/10691412, lastupdated="2023-03-08 20:07:22", Lifecycle Status=Active, Minimum Order=1, Mounting Type="Surface Mount, MLCC", Package / Case="0603 (1608 Metric)", Packaging=TapeAndReel, Part Number=GRM188R60J106KE47J, Part Status=Active, partid=47219, price=0.01, Series=GRM, Size / Dimension="0.063\" L x 0.032\" W (1.60mm x 0.80mm)", Supplier 1=Digi-Key, Supplier 2=Digi-Key, Supplier 3=Digi-Key, Supplier Part Number 2=490-GRM188R60J106KE47JDKR-ND, Supplier Part Number 3=490-GRM188R60J106KE47JTR-ND, Thickness (Max)="0.035\" (0.90mm)"
C49 C51: library part "Cap Ceramic 20 pF SMT 0603", "20 pF ±5% 50V Ceramic Capacitor C0G, NP0 0603 (1608 Metric)", Capacitance="20 pF", Device Package="0603 (1608 Metric)", Manufacturer=Yageo, Operating Temperature="-55°C ~ 125°C", Supplier Part Number 1=311-1424-1-ND, Temperature Coefficient="C0G, NP0", Tolerance=±5%, Voltage - Rated=50V, Applications="General Purpose", ComponentLink1Description=Datasheet, ComponentLink1URL=https://www.yageo.com/upload/media/product/productsearch/datasheet/mlcc/UPY-GP_NP0_16V-to-50V_17.pdf, ComponentLink2Description="DigiKey Link", ComponentLink2URL=https://www.digikey.com/en/products/detail/yageo/CC0603JRNPO9BN200/2833589, lastupdated="2023-03-06 20:07:50", Lifecycle Status=Active, Minimum Order=1, Mounting Type="Surface Mount, MLCC", Package / Case="0603 (1608 Metric)", Packaging=TapeAndReel, Part Number=CC0603JRNPO9BN200, Part Status=Active, partid=16728, price=0.01, Series=CC, Size / Dimension="0.063\" L x 0.031\" W (1.60mm x 0.80mm)", Supplier 1=Digi-Key, Supplier 2=Digi-Key, Supplier 3=Digi-Key, Supplier Part Number 2=311-1424-6-ND, Supplier Part Number 3=311-1424-2-ND, Thickness (Max)="0.035\" (0.90mm)"
D1: library part "Schottky Diode 30V", "Schottky Diode 30 V 500mA Surface Mount SOD-323", Capacitance @ Vr, F="10pF @ 1V, 1MHz", Current - Average Rectified (Io)="500mA (DC)", Current - Reverse Leakage @ Vr="200µA @ 30V", Manufacturer="ON Semiconductor", Operating Temperature - Junction="-55°C ~ 150°C", Package / Case="SC-76, SOD-323", Part Number=NSR0530HT1G, Supplier Device Package=SOD-323, Supplier Part Number 1=NSR0530HT1GOSCT-ND, Voltage - DC Reverse (Vr) (Max)=30V, Voltage - Forward (Vf) (Max) @ If="620mV @ 500mA", ComponentLink1Description=Datasheet, ComponentLink1URL=http://www.onsemi.com/pub/Collateral/NSR0530H-D.PDF, ComponentLink2Description="DigiKey Link", ComponentLink2URL=http://digikey.com/product-detail/en/on-semiconductor/NSR0530HT1G/NSR0530HT1GOSCT-ND/5761654, Diode Type=Schottky, lastupdated="2023-03-06 21:08:52", Lifecycle Status=Active, Minimum Order=1, Mounting Type="Surface Mount", Packaging=TapeAndReel, Part Status=Active, partid=3077, price=0.03, Series=-, Speed="Fast Recovery =< 500ns, > 200mA (Io)", Supplier 1=Digi-Key, Supplier 2=Digi-Key, Supplier 3=Digi-Key, Supplier Part Number 2=NSR0530HT1GOSDKR-ND, Supplier Part Number 3=NSR0530HT1GOSTR-ND
ESD1: "32.4V Clamp 18.6A Ipp Tvs Diode Surface Mount SMB (DO-214AA)", Max Breakdown Voltage=25.5V, Max Power Dissipation=600W, Max Surge Current=100A, Min Breakdown Voltage=22.2V, Peak Pulse Current=18.6A, Reverse Standoff Voltage=20V, Supplier Part Number 1=SMBJ20CABCT-ND, ComponentLink1Description=Datasheet, ComponentLink1URL=https://www.bourns.com/docs/Product-Datasheets/SMBJ.pdf, Diode Type=Zener, Direction=Bidirectional, Element Configuration=Single, Supplier 1=Digi-Key, Supplier 2=Digi-Key, Supplier Part Number 2=SMBJ20CABDKR-ND
FB1 FB2: library part "Ferrite Bead 470R SMT 0603", "470 Ω @ 100 MHz 1 Power Line Ferrite Bead 0603 (1608 Metric) 1A 200mOhm", Current Rating (Max)=1A, DC Resistance (DCR) (Max)=200mOhm, Device Package="0603 (1608 Metric)", Impedance @ Frequency="470 Ohms @ 100 MHz", Manufacturer="Murata Electronics", Operating Temperature="-55°C ~ 125°C", Supplier Part Number 1=490-5223-1-ND, ComponentLink1Description=Datasheet, ComponentLink1URL=https://www.murata.com/en-us/products/productdata/8796738650142/ENFA0003.pdf, ComponentLink2Description="DigiKey Link", ComponentLink2URL=https://www.digikey.com/en/products/detail/murata-electronics/BLM18PG471SN1D/1948328, Filter Type="Power Line", Height (Max)="0.037\" (0.95mm)", lastupdated="2023-03-06 20:49:55", Lifecycle Status=Active, Minimum Order=1, Mounting Type="Surface Mount", Number of Lines=1, Package / Case="0603 (1608 Metric)", Packaging=TapeAndReel, Part Number=BLM18PG471SN1D, Part Status=Active, partid=856, price=0.02, Series="EMIFIL®, BLM18", Size / Dimension="0.063\" L x 0.032\" W (1.60mm x 0.80mm)", Supplier 1=Digi-Key, Supplier 2=Digi-Key, Supplier 3=Digi-Key, Supplier Part Number 2=490-5223-6-ND, Supplier Part Number 3=490-5223-2-ND
J1: library part "Power Barrel Connector Jack 2.10mm", "Power Barrel Connector Jack 2.10mm ID (0.083\"), 5.50mm OD (0.217\") Through Hole, Right Angle", Current Rating=8A, Flammability Rating="UL94 V-0", Insulation Resistance=100MR, Max Operating Temperature=85°C, Min Operating Temperature=-25°C, Supplier Part Number 1=CP-063AH-ND, Voltage Rating=24V, ComponentLink1Description=Datasheet, ComponentLink1URL=https://www.cuidevices.com/product/resource/pj-063ah.pdf, Contact Material=Copper, Contact Plating=Nickel, Number of Conductors=2, Shielding=Shielded, Supplier 1=Digi-Key
J2 J3 J4 J5: library part "Headers 20 Pos TH 0.079\"", "Connector Header Through Hole 20 position 0.079\" (2.00mm)", Supplier Part Number 1=2073-BF050-20-A-B-0600-0300-L-G-ND, Supplier 1=Digi-Key
L1: library part "Inductor 4.7 µH SMT 0603", "4.7 µH Shielded Multilayer Inductor 15 mA 2.1Ohm Max 0603 (1608 Metric)", Case Code (Imperial)=1206, Max Operating Temperature=125°C, Min Operating Temperature=-55°C, Self Resonant Frequency=41MHz, Supplier Part Number 1=541-4369-1-ND, Tolerance=10%, ComponentLink1Description=Datasheet, ComponentLink1URL=https://www.vishay.com/docs/34029/ilsb1206.pdf, Core Material=Ferrite, Depth=1.8mm, Supplier 1=Digi-Key, Supplier 2=Digi-Key, Supplier Part Number 2=541-4369-6-ND, Weight=0.000353oz, Width=1.6mm
LED1: library part CMP-007-00044-1, "Led, Green, T-1 3/4 (5Mm), 522 Nm, 3.4 V, 30 Ma, 10 Cd Rohs Compliant: Yes", Case/Package=Radial, Color=Green, Forward Current=30mA, Forward Voltage=3.4V, Lens Color=Colorless, Max Operating Temperature=85°C, Min Operating Temperature=-40°C, Package Quantity=1, Test Current=20mA, Dominant Wavelength=522nm, Height=8.85mm, Lens Size=5mm, Lens Style=Round,Domed,Circular, Lens Transparency=Clear, Luminous Intensity=10000mcd, Mounting Technology="Through Hole", Packaging=Bulk, RoHS Compliant=Yes, Series=WL-TMRW, Viewing Angle=30°, Wavelength=522nm
MUX1 MUX2 MUX3 MUX4 MUX5 MUX6 MUX7 MUX8: library part "MUX Analog 8:1", "5-V, 8: 1, 1-channel general-purpose analog multiplexer with 1.8-V input logic 16-TSSOP -40 to 125", Supplier Part Number 1=296-51847-1-ND, ComponentLink1Description=Datasheet, ComponentLink1URL=https://www.ti.com/lit/ds/symlink/tmux1208.pdf?HQS=dis-dk-null-digikeymode-dsf-pf-null-wwe&ts=1678139087624&ref_url=https%253A%252F%252Fwww.ti.com%252Fgeneral%252Fdocs%252Fsuppproductinfo.tsp%253FdistId%253D10%2526gotoUrl%253Dhttps%253A%252F%252Fwww.ti.com%252Flit%252Fgpn%252Ftmux1208, Supplier 1=Digi-Key, Supplier 2=Digi-Key, Supplier 3=Digi-Key, Supplier Part Number 2=296-51847-6-ND, Supplier Part Number 3=296-51847-2-ND
Q1: "P-Channel 30 V 2.3A (Ta) 1.25W (Ta) Surface Mount Micro3™/SOT-23", Current - Continuous Drain (Id) @ 25°C="2.3A (Ta)", Drain to Source Voltage (Vdss)="30 V", Drive Voltage (Max Rds On,  Min Rds On)="4.5V, 10V", Input Capacitance (Ciss) (Max) @ Vds="160 pF @ 25 V", Manufacturer="Infineon Technologies", Operating Temperature="-55°C ~ 150°C (TJ)", Package / Case="TO-236-3, SC-59, SOT-23-3", Part Number=IRLML9303TRPBF, Power Dissipation (Max)="1.25W (Ta)", Supplier Device Package=Micro3™/SOT-23, Supplier Part Number 1=IRLML9303TRPBFCT-ND, ComponentLink1Description=Datasheet, ComponentLink1URL=https://www.infineon.com/dgdl/irlml9303pbf.pdf?fileId=5546d462533600a401535668ef1d2642, ComponentLink2Description="DigiKey Link", ComponentLink2URL=https://www.digikey.com/en/products/detail/infineon-technologies/IRLML9303TRPBF/2354147, FET Type=P-Channel, Gate Charge (Qg) (Max) @ Vgs="2 nC @ 4.5 V", lastupdated="2023-03-05 21:05:43", Lifecycle Status=Active, Minimum Order=1, Mounting Type="Surface Mount", Packaging=TapeAndReel, Part Status=Active, price=0.11, Rds On (Max) @ Id, Vgs="165mOhm @ 2.3A, 10V", Series=HEXFET®, Supplier 1=Digi-Key, Supplier 2=Digi-Key, Supplier 3=Digi-Key, Supplier Part Number 2=IRLML9303TRPBFDKR-ND, Supplier Part Number 3=IRLML9303TRPBFTR-ND, Technology="MOSFET (Metal Oxide)", Vgs (Max)=±20V, Vgs(th) (Max) @ Id="2.4V @ 10µA"
R1: library part "Res 2.4 kΩ SMT 0603", "2.4 kOhms ±1% 0.1W, 1/10W Chip Resistor 0603 (1608 Metric) Automotive AEC-Q200, Moisture Resistant Thick Film", Device Package="0603 (1608 Metric)", Manufacturer=Yageo, Operating Temperature="-55°C ~ 155°C", Power (Watts)="0.1W, 1/10W", Ratings=AEC-Q200, Resistance=2K4, Supplier Device Package=0603, Supplier Part Number 1=YAG5724CT-ND, Temperature Coefficient=±100ppm/°C, Tolerance=±1%, ComponentLink1Description=Datasheet, ComponentLink1URL=https://www.yageo.com/upload/media/product/productsearch/datasheet/rchip/PYu-AC_51_RoHS_L_7.pdf, ComponentLink2Description="DigiKey Link", ComponentLink2URL=https://www.digikey.com/en/products/detail/yageo/AC0603FR-072K4L/5895989, Composition="Thick Film", Features="Automotive AEC-Q200, Moisture Resistant", Height - Seated (Max)="0.022\" (0.55mm)", lastupdated="2023-03-07 20:28:01", Lifecycle Status=Active, Minimum Order=1, Number of Terminations=2, Package / Case="0603 (1608 Metric)", Packaging=CutTape, Part Number=AC0603FR-072K4L, Part Status=Active, partid=22004, price=0.01, Series=AC, Size / Dimension="0.063\" L x 0.031\" W (1.60mm x 0.80mm)", Supplier 1=Digi-Key, Supplier 2=Digi-Key, Supplier 3=Digi-Key, Supplier Part Number 2=YAG5724DKR-ND, Supplier Part Number 3=YAG5724TR-ND
R2: library part "Res 5.1 kΩ SMT 0603", "5.1 kOhms ±1% 0.1W, 1/10W Chip Resistor 0603 (1608 Metric) Automotive AEC-Q200, Moisture Resistant Thick Film", Device Package="0603 (1608 Metric)", Manufacturer=Yageo, Operating Temperature="-55°C ~ 155°C", Power (Watts)="0.1W, 1/10W", Ratings=AEC-Q200, Resistance=5K1, Supplier Device Package=0603, Supplier Part Number 1=YAG3621CT-ND, Temperature Coefficient=±100ppm/°C, Tolerance=±1%, ComponentLink1Description=Datasheet, ComponentLink1URL=https://www.yageo.com/upload/media/product/productsearch/datasheet/rchip/PYu-AC_51_RoHS_L_7.pdf, ComponentLink2Description="DigiKey Link", ComponentLink2URL=https://www.digikey.com/en/products/detail/yageo/AC0603FR-075K1L/5896209, Composition="Thick Film", Features="Automotive AEC-Q200, Moisture Resistant", Height - Seated (Max)="0.022\" (0.55mm)", lastupdated="2023-03-07 20:28:19", Lifecycle Status=Active, Minimum Order=1, Number of Terminations=2, Package / Case="0603 (1608 Metric)", Packaging=CutTape, Part Number=AC0603FR-075K1L, Part Status=Active, partid=17442, price=0.01, Series=AC, Size / Dimension="0.063\" L x 0.031\" W (1.60mm x 0.80mm)", Supplier 1=Digi-Key, Supplier 2=Digi-Key, Supplier 3=Digi-Key, Supplier Part Number 2=YAG3621DKR-ND, Supplier Part Number 3=YAG3621TR-ND
R3: "22.1 kΩ ±1% 0.1W, 1/10W Chip Resistor 0603 (1608 Metric) Automotive AEC-Q200 Thick Film", Device Package="0603 (1608 Metric)", Manufacturer="Vishay Dale", Operating Temperature="-55°C ~ 155°C", Part Number=CRCW060322K1FKEA, Power (Watts)="0.1W, 1/10W", Ratings=AEC-Q200, Resistance=22K1, Supplier Device Package=0603, Supplier Part Number 1=541-221KHCT-ND, Temperature Coefficient=±100ppm/°C, Tolerance=±1%, ComponentLink1Description=Datasheet, ComponentLink1URL=http://www.vishay.com/docs/20035/dcrcwe3.pdf, ComponentLink2Description="DigiKey Link", ComponentLink2URL=https://www.digikey.com/en/products/detail/vishay-dale/CRCW060322K1FKEA/1174819, Composition="Thick Film", Features="Automotive AEC-Q200", Height - Seated (Max)="0.020\" (0.50mm)", lastupdated="2023-03-06 20:28:36", Lifecycle Status=Active, Minimum Order=1, Number of Terminations=2, Package / Case="0603 (1608 Metric)", Packaging=TapeAndReel, Part Status=Active, partid=12700, price=0.01, Series=CRCW, Size / Dimension="0.061\" L x 0.033\" W (1.55mm x 0.85mm)", Supplier 1=Digi-Key, Supplier 2=Digi-Key, Supplier 3=Digi-Key, Supplier Part Number 2=541-221KHDKR-ND, Supplier Part Number 3=541-221KHTR-ND
R4: "88.7 kΩ ±1% 0.1W, 1/10W Chip Resistor 0603 (1608 Metric) Automotive AEC-Q200 Thick Film", Device Package="0603 (1608 Metric)", Manufacturer="Vishay Dale", Operating Temperature="-55°C ~ 155°C", Part Number=CRCW060388K7FKEB, Power (Watts)="0.1W, 1/10W", Ratings=AEC-Q200, Resistance=88K7, Supplier Device Package=0603, Supplier Part Number 1=541-CRCW060388K7FKEBCT-ND, Temperature Coefficient=±100ppm/°C, Tolerance=±1%, ComponentLink1Description=Datasheet, ComponentLink1URL=http://www.vishay.com/docs/20035/dcrcwe3.pdf, ComponentLink2Description="DigiKey Link", ComponentLink2URL=https://www.digikey.com/en/products/detail/vishay-dale/CRCW060388K7FKEB/5073407, Composition="Thick Film", Features="Automotive AEC-Q200", Height - Seated (Max)="0.020\" (0.50mm)", lastupdated="2023-03-06 20:27:22", Lifecycle Status=Active, Minimum Order=1, Number of Terminations=2, Package / Case="0603 (1608 Metric)", Packaging=CutTape, Part Status=Active, partid=56612, price=0.01, Series=CRCW, Size / Dimension="0.063\" L x 0.033\" W (1.60mm x 0.85mm)", Supplier 1=Digi-Key, Supplier 2=Digi-Key, Supplier Part Number 2=541-CRCW060388K7FKEBDKR-ND
R5 R6 R7 R8 R9 R10 R11 R12 R13 R14 R15 R16 R17 R18 R19 R20 R21 R22 R23 R24 R25 R26 R27 R28: "10 kΩ  ±0.1% 0.1W, 1/10W Chip Resistor 0603 (1608 Metric) Thin Film", Device Package="0603 (1608 Metric)", Manufacturer=Yageo, Operating Temperature="-55°C ~ 155°C", Part Number=RT0603BRD0710KL, Power (Watts)="0.1W, 1/10W", Resistance=10K, Supplier Device Package=0603, Supplier Part Number 1=YAG1236CT-ND, Temperature Coefficient=±25ppm/°C, Tolerance=±0.1%, ComponentLink1Description=Datasheet, ComponentLink1URL=https://www.yageo.com/upload/media/product/productsearch/datasheet/rchip/PYu-RT_1-to-0.01_RoHS_L_11.pdf, ComponentLink2Description="DigiKey Link", ComponentLink2URL=https://www.digikey.com/en/products/detail/yageo/RT0603BRD0710KL/1072198, Composition="Thin Film", Height - Seated (Max)="0.022\" (0.55mm)", lastupdated="2023-03-06 20:27:57", Lifecycle Status=Active, Minimum Order=1, Number of Terminations=2, Package / Case="0603 (1608 Metric)", Packaging=TapeAndReel, Part Status=Active, partid=22611, price=0.03, Series=RT, Size / Dimension="0.063\" L x 0.031\" W (1.60mm x 0.80mm)", Supplier 1=Digi-Key, Supplier 2=Digi-Key, Supplier 3=Digi-Key, Supplier Part Number 2=YAG1236DKR-ND, Supplier Part Number 3=YAG1236TR-ND
R30 R31: library part "Res 50R SMT 0603", "50Ω ±1% 0.1W, 1/10W Chip Resistor 0603 (1608 Metric) Automotive AEC-Q200 Thick Film", Device Package="0603 (1608 Metric)", Manufacturer="Vishay Dale", Operating Temperature="-55°C ~ 155°C", Power (Watts)="0.1W, 1/10W", Ratings=AEC-Q200, Resistance=50Ω, Supplier Device Package=0603, Supplier Part Number 1=71-CRCW0603-50-E3, Temperature Coefficient=±100ppm/°C, Tolerance=±1%, ComponentLink1Description=Datasheet, ComponentLink1URL=http://www.vishay.com/docs/20035/dcrcwe3.pdf, ComponentLink2Description="DigiKey Link", ComponentLink2URL=http://digikey.com/product-detail/en/vishay-dale/CRCW060350R0FKEA/541-3318-1-ND/6684924, Composition="Thick Film", Features="Automotive AEC-Q200", Height - Seated (Max)="0.020\" (0.50mm)", lastupdated="2023-03-07 20:27:49", Lifecycle Status=Active, Minimum Order=1, Number of Terminations=2, Package / Case="0603 (1608 Metric)", Packaging=CutTape, Part Number=CRCW060350R0FKEA, Part Status=Active, partid=23780, price=0.10, Series=CRCW, Size / Dimension="0.061\" L x 0.033\" W (1.55mm x 0.85mm)", Supplier 1=Mouser
R?: library part RC0603FR-0722K1L, "RES 22.1K OHM 1% 1/10W 0603", Device Package="0603 (1608 Metric)", Manufacturer=Yageo, Operating Temperature="-55°C ~ 155°C", Power (Watts)="0.1W, 1/10W", Supplier Device Package=0603, Supplier Part Number 1=311-22.1KHRCT-ND, Temperature Coefficient=±100ppm/°C, Tolerance=±1%, ComponentLink1Description=Datasheet, ComponentLink1URL=https://www.yageo.com/upload/media/product/productsearch/datasheet/rchip/PYu-RC_Group_51_RoHS_L_10.pdf, ComponentLink2Description="DigiKey Link", ComponentLink2URL=https://www.digikey.com/en/products/detail/yageo/RC0603FR-0722K1L/727058, Composition="Thick Film", Features="Moisture Resistant", Height - Seated (Max)="0.022\" (0.55mm)", lastupdated="2023-03-08 20:29:23", Lifecycle Status=Active, Minimum Order=1, Number of Terminations=2, Package / Case="0603 (1608 Metric)", Packaging=CutTape, Part Number=RC0603FR-0722K1L, Part Status=Active, partid=19017, price=0.01, Resistance="22.1 kOhms", Series=RC_L, Size / Dimension="0.063\" L x 0.031\" W (1.60mm x 0.80mm)", Supplier 1=DigiKey
R?: library part RC0603FR-0788K7L, "RES 88.7K OHM 1% 1/10W 0603", Device Package="0603 (1608 Metric)", Manufacturer=Yageo, Operating Temperature="-55°C ~ 155°C", Power (Watts)="0.1W, 1/10W", Supplier Device Package=0603, Supplier Part Number 1=311-88.7KHRCT-ND, Temperature Coefficient=±100ppm/°C, Tolerance=±1%, ComponentLink1Description=Datasheet, ComponentLink1URL=https://www.yageo.com/upload/media/product/productsearch/datasheet/rchip/PYu-RC_Group_51_RoHS_L_10.pdf, ComponentLink2Description="DigiKey Link", ComponentLink2URL=https://www.digikey.com/en/products/detail/yageo/RC0603FR-0788K7L/727415, Composition="Thick Film", Features="Moisture Resistant", Height - Seated (Max)="0.022\" (0.55mm)", lastupdated="2023-03-08 20:30:08", Lifecycle Status=Active, Minimum Order=1, Number of Terminations=2, Package / Case="0603 (1608 Metric)", Packaging=CutTape, Part Number=RC0603FR-0788K7L, Part Status=Active, partid=7595, price=0.01, Resistance="88.7 kOhms", Series=RC_L, Size / Dimension="0.063\" L x 0.031\" W (1.60mm x 0.80mm)", Supplier 1=DigiKey
TVS1: "25V Clamp 6A (8/20µs) Ipp Tvs Diode Surface Mount SC-70-6", Supplier Part Number 1=RCLAMP0504FATCTCT-ND, Supplier 1=Digi-Key, Supplier 2=Digi-Key, Supplier 3=Digi-Key, Supplier Part Number 2=RCLAMP0504FATCTDKR-ND, Supplier Part Number 3=RCLAMP0504FATCTTR-ND
U1 U2 U3: library part "Instrumentation Op Amp 35 MHz 8 pins", "Instrumentation Amplifier 1 Circuit Rail-to-Rail 8-SOIC", Supplier Part Number 1=MCP6N11-100E/SN-ND, Supplier 1=Digi-Key
U4 U5 U6 U7 U8: "Instrumentation Amplifier 1 Circuit Rail-to-Rail 8-SOIC", Supplier Part Number 1=MCP6N11-100E/SN-ND, Supplier 1=Digi-Key
USB1: library part "USB Micro-AB Connector A", "USB - Micro AB 2.0 Receptacle Connector 5 Position, Vertical, Through Hole with 2.30 mm (Standard) Shell Stakes, 5-Pin THD, RoHS, Tape and Reel", Supplier Part Number 1=18X0232, Supplier 1=Newark
VREF1 VREF3: "Series Voltage Reference IC Fixed 3.3V V ±0.1% 20 mA SOT-23-6", Case/Package=SOT-23-6, Max Operating Temperature=125°C, Min Operating Temperature=-40°C, Min Output Voltage=3.3V, Operating Supply Current=550μA, Output Current=20mA, Supplier Part Number 1=MCP1501T-33E/CHYCT-ND, Temperature Coefficient=50ppm/°C, Tolerance=0.08%, ComponentLink1Description=Datasheet, ComponentLink1URL=https://ww1.microchip.com/downloads/aemDocuments/documents/MSLD/ProductDocuments/DataSheets/MCP1501-Data-Sheet-DS20005474F.pdf, Output Type=Fixed, Reference Type=Series, Supplier 1=Digi-Key, Supplier 2=Digi-Key, Supplier 3=Digi-Key, Supplier Part Number 2=MCP1501T-33E/CHYDKR-ND, Supplier Part Number 3=MCP1501T-33E/CHYTR-ND
VREF2: "Series Voltage Reference IC Fixed 1.8V V ±0.1% 20 mA SOT-23-6", Case/Package=SOT-23-6, Max Operating Temperature=125°C, Min Operating Temperature=-40°C, Min Output Voltage=1.8V, Operating Supply Current=550μA, Output Current=20mA, Supplier Part Number 1=MCP1501T-18E/CHYCT-ND, Temperature Coefficient=50ppm/°C, Tolerance=0.08%, ComponentLink1Description=Datasheet, ComponentLink1URL=https://ww1.microchip.com/downloads/aemDocuments/documents/MSLD/ProductDocuments/DataSheets/MCP1501-Data-Sheet-DS20005474F.pdf, Output Type=Fixed, Reference Type=Series, Supplier 1=Digi-Key, Supplier 2=Digi-Key, Supplier Part Number 2=MCP1501T-18E/CHYDKR-ND